# EAGLE board layout_final_pcb (EAGLE 9.7.0), part 1 of 3
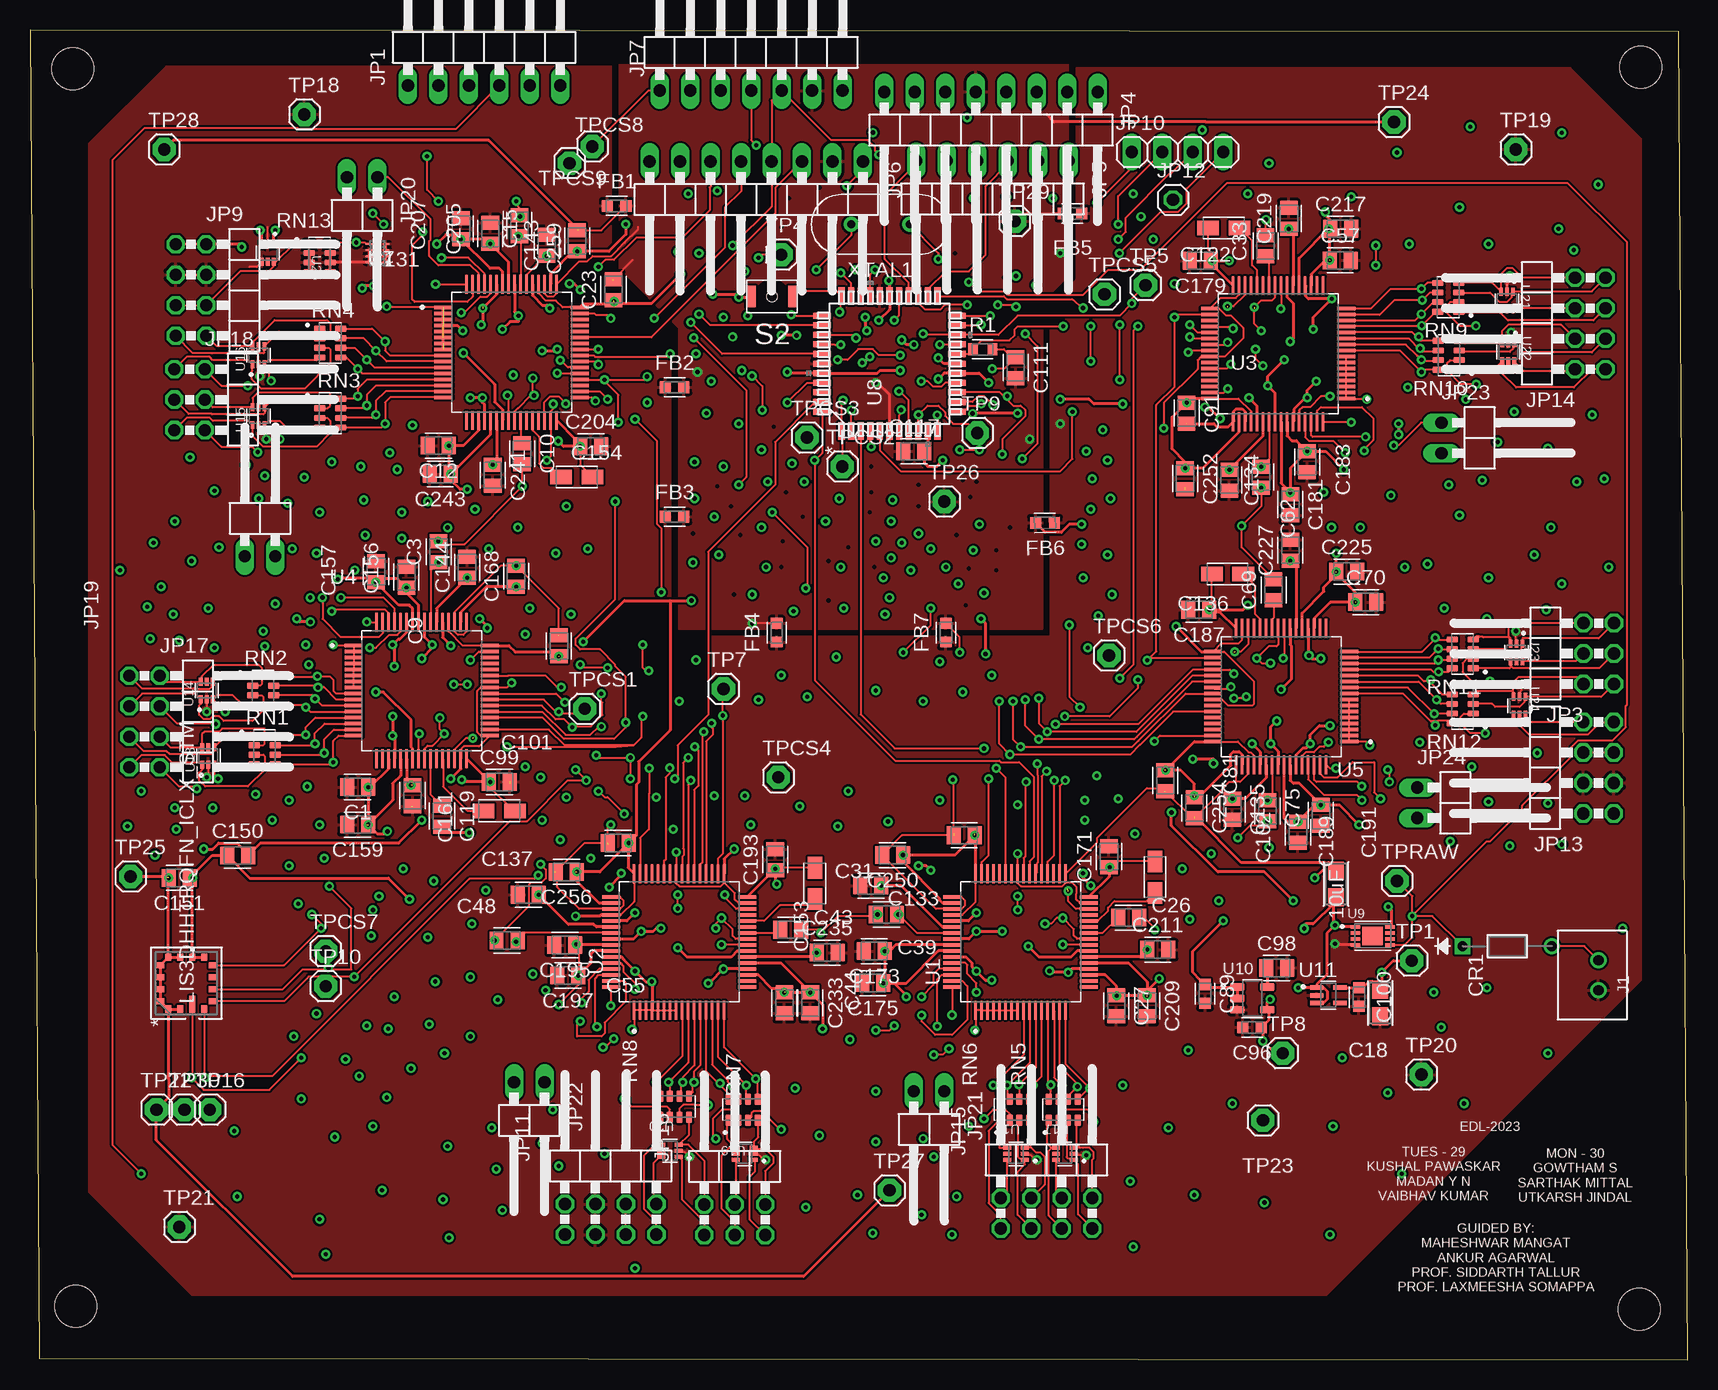
[diagram p0: board, top side]
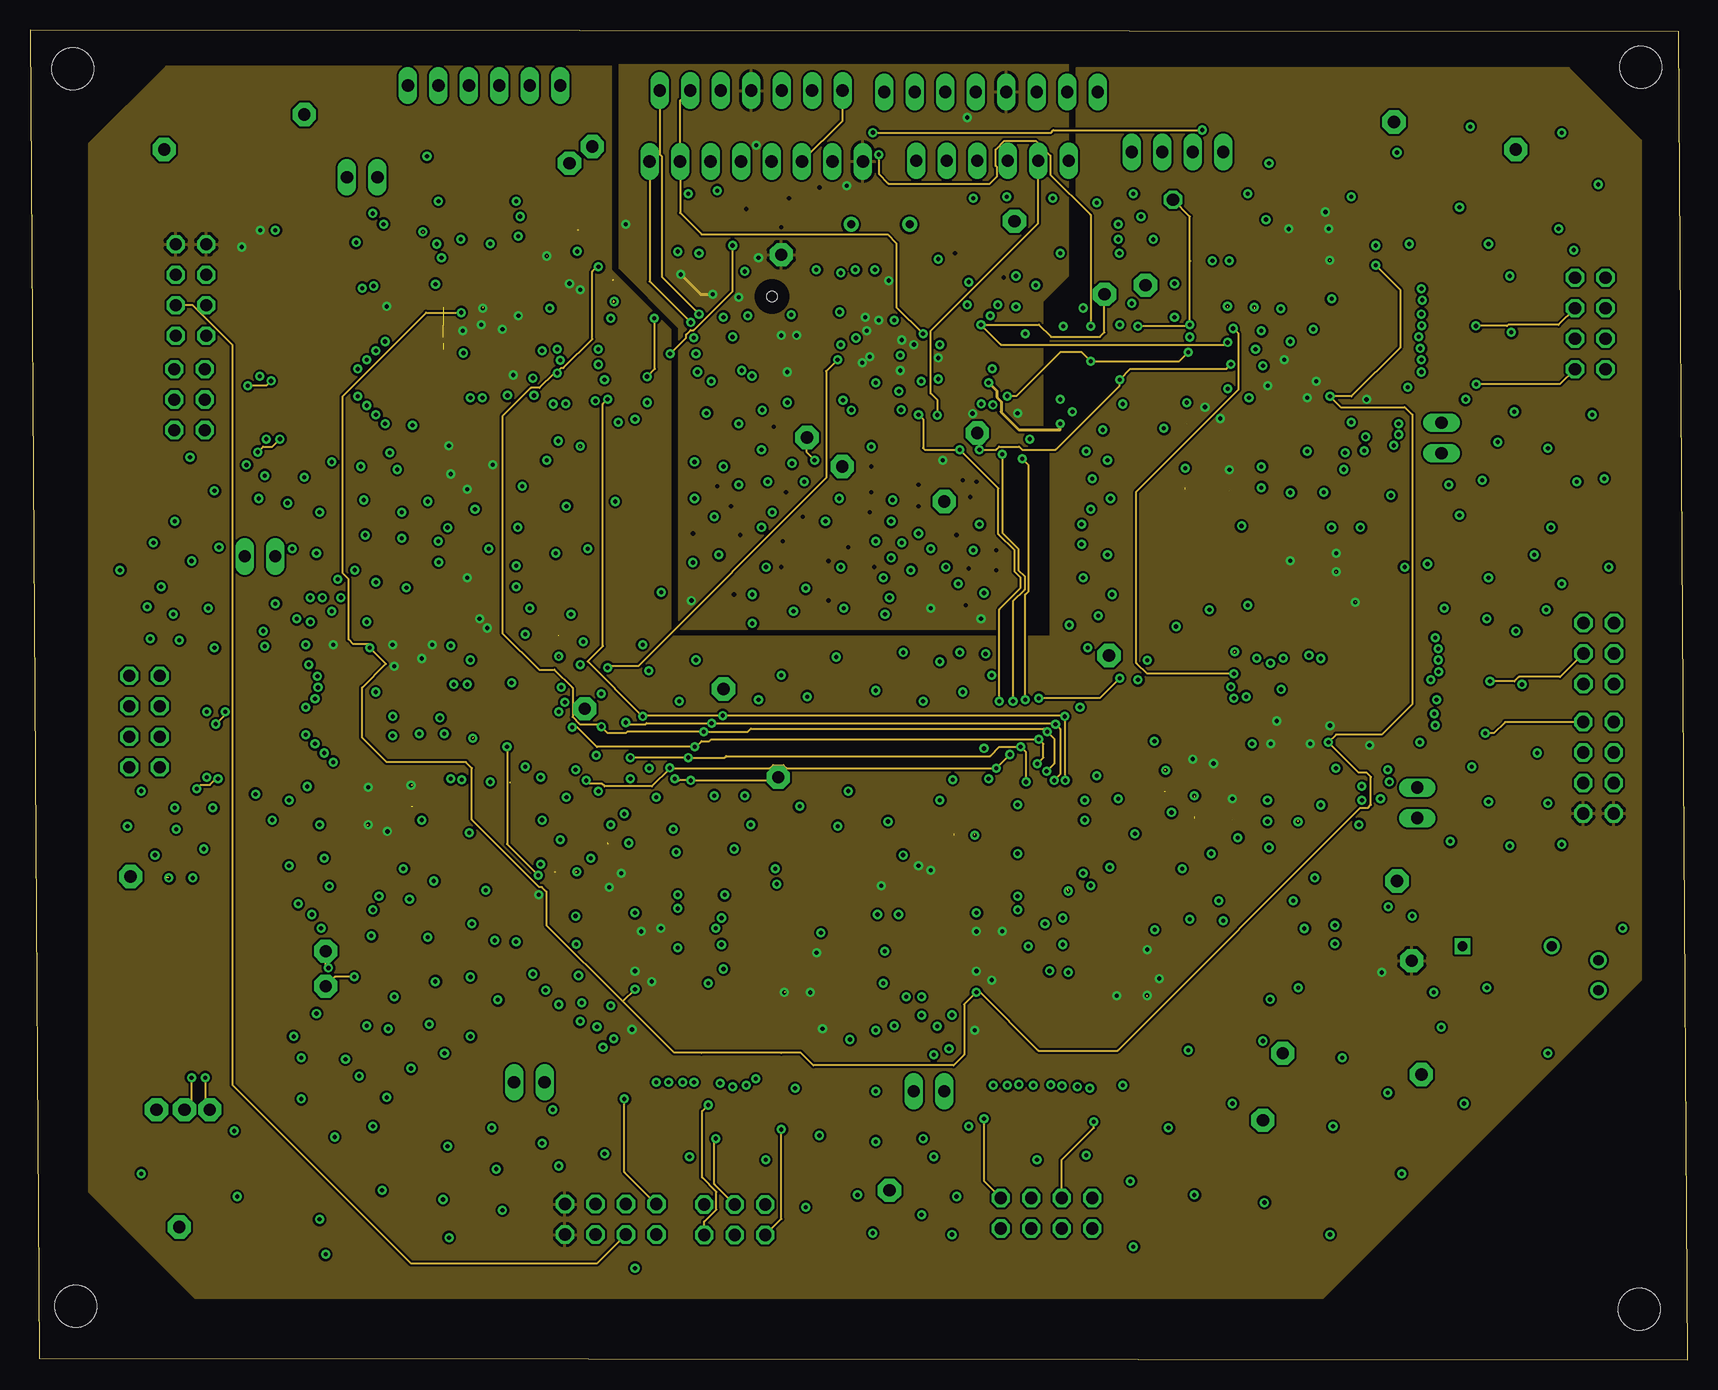
[diagram p1: board, inner layer Route2]
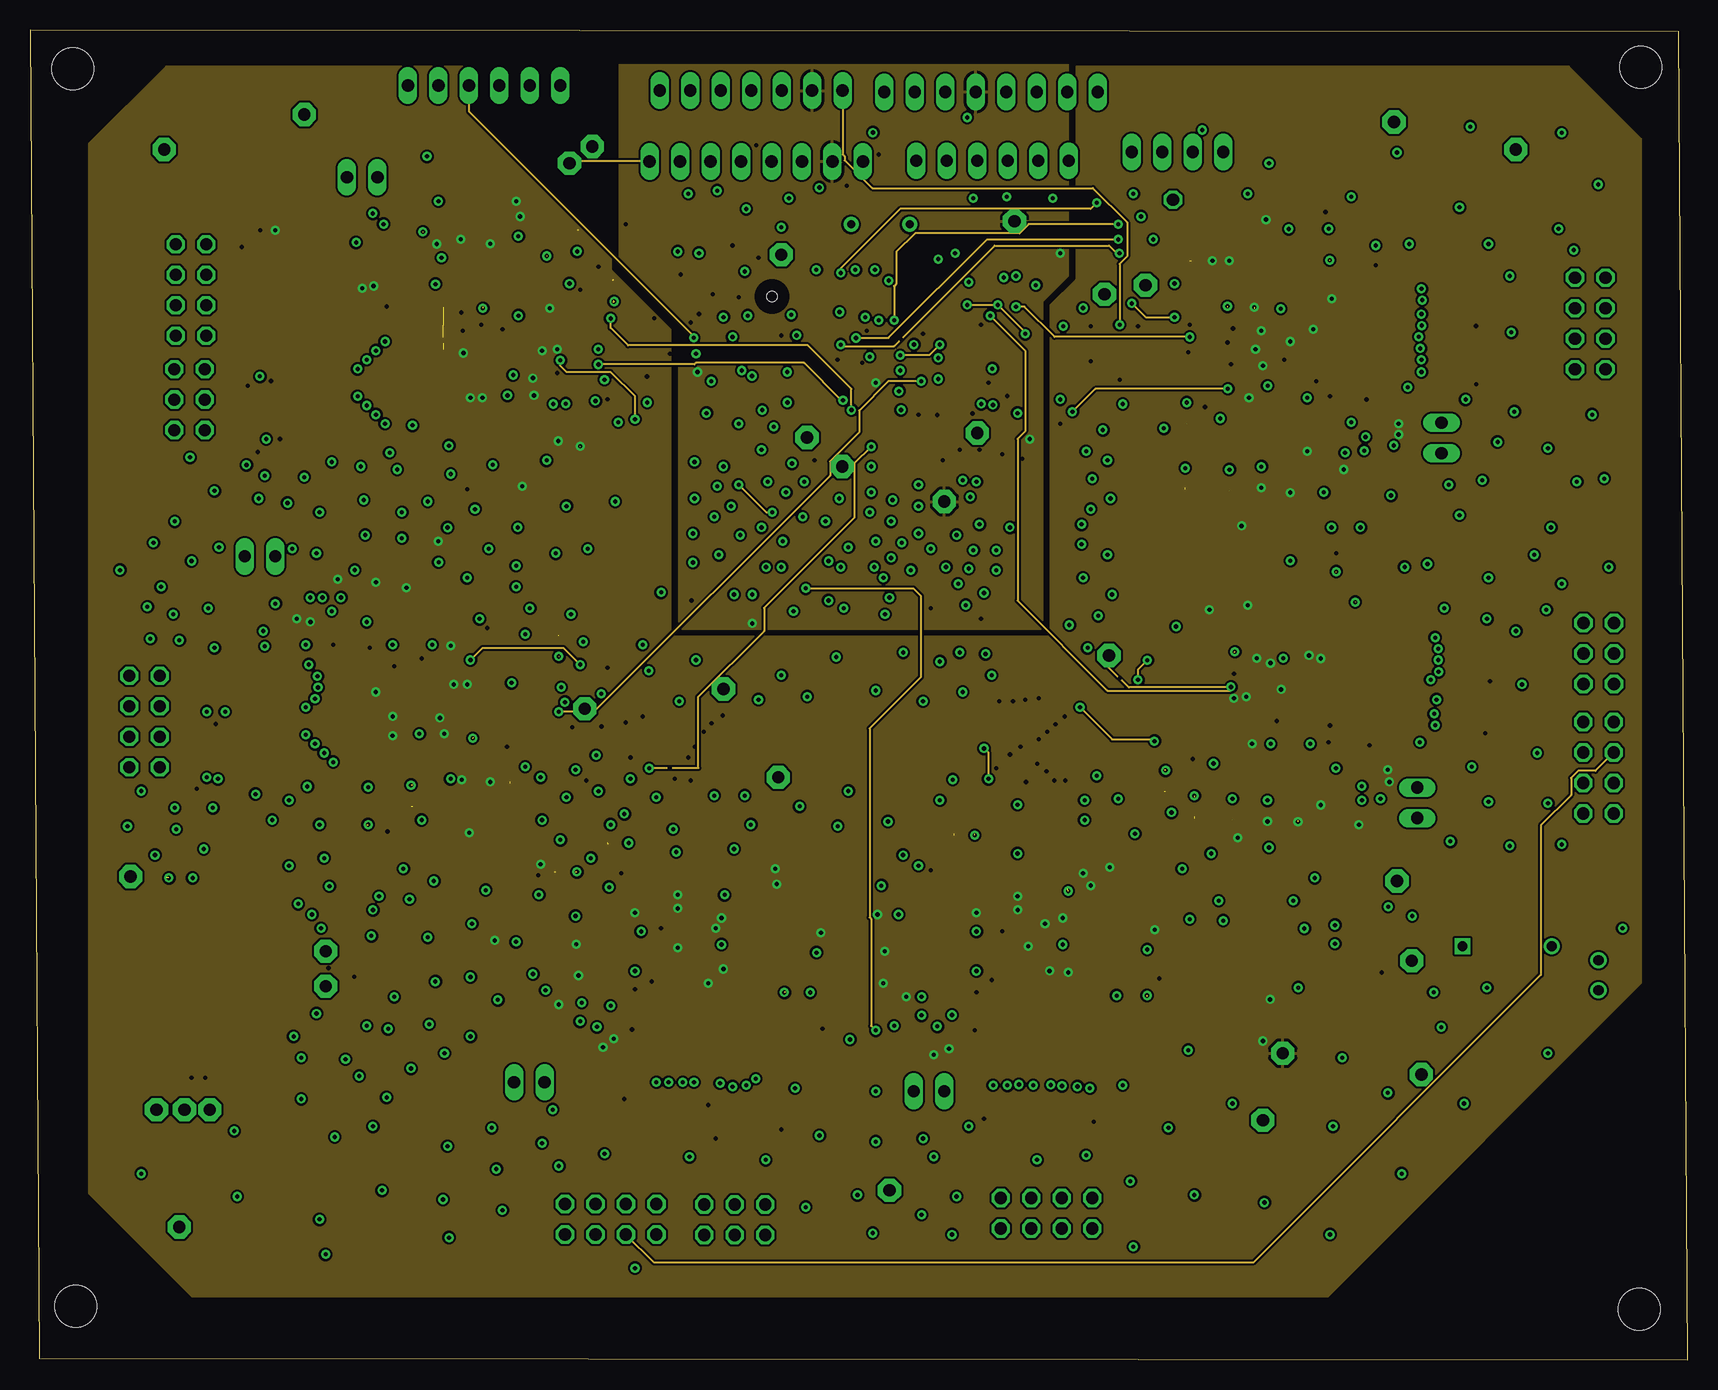
[diagram p2: board, inner layer Route15]
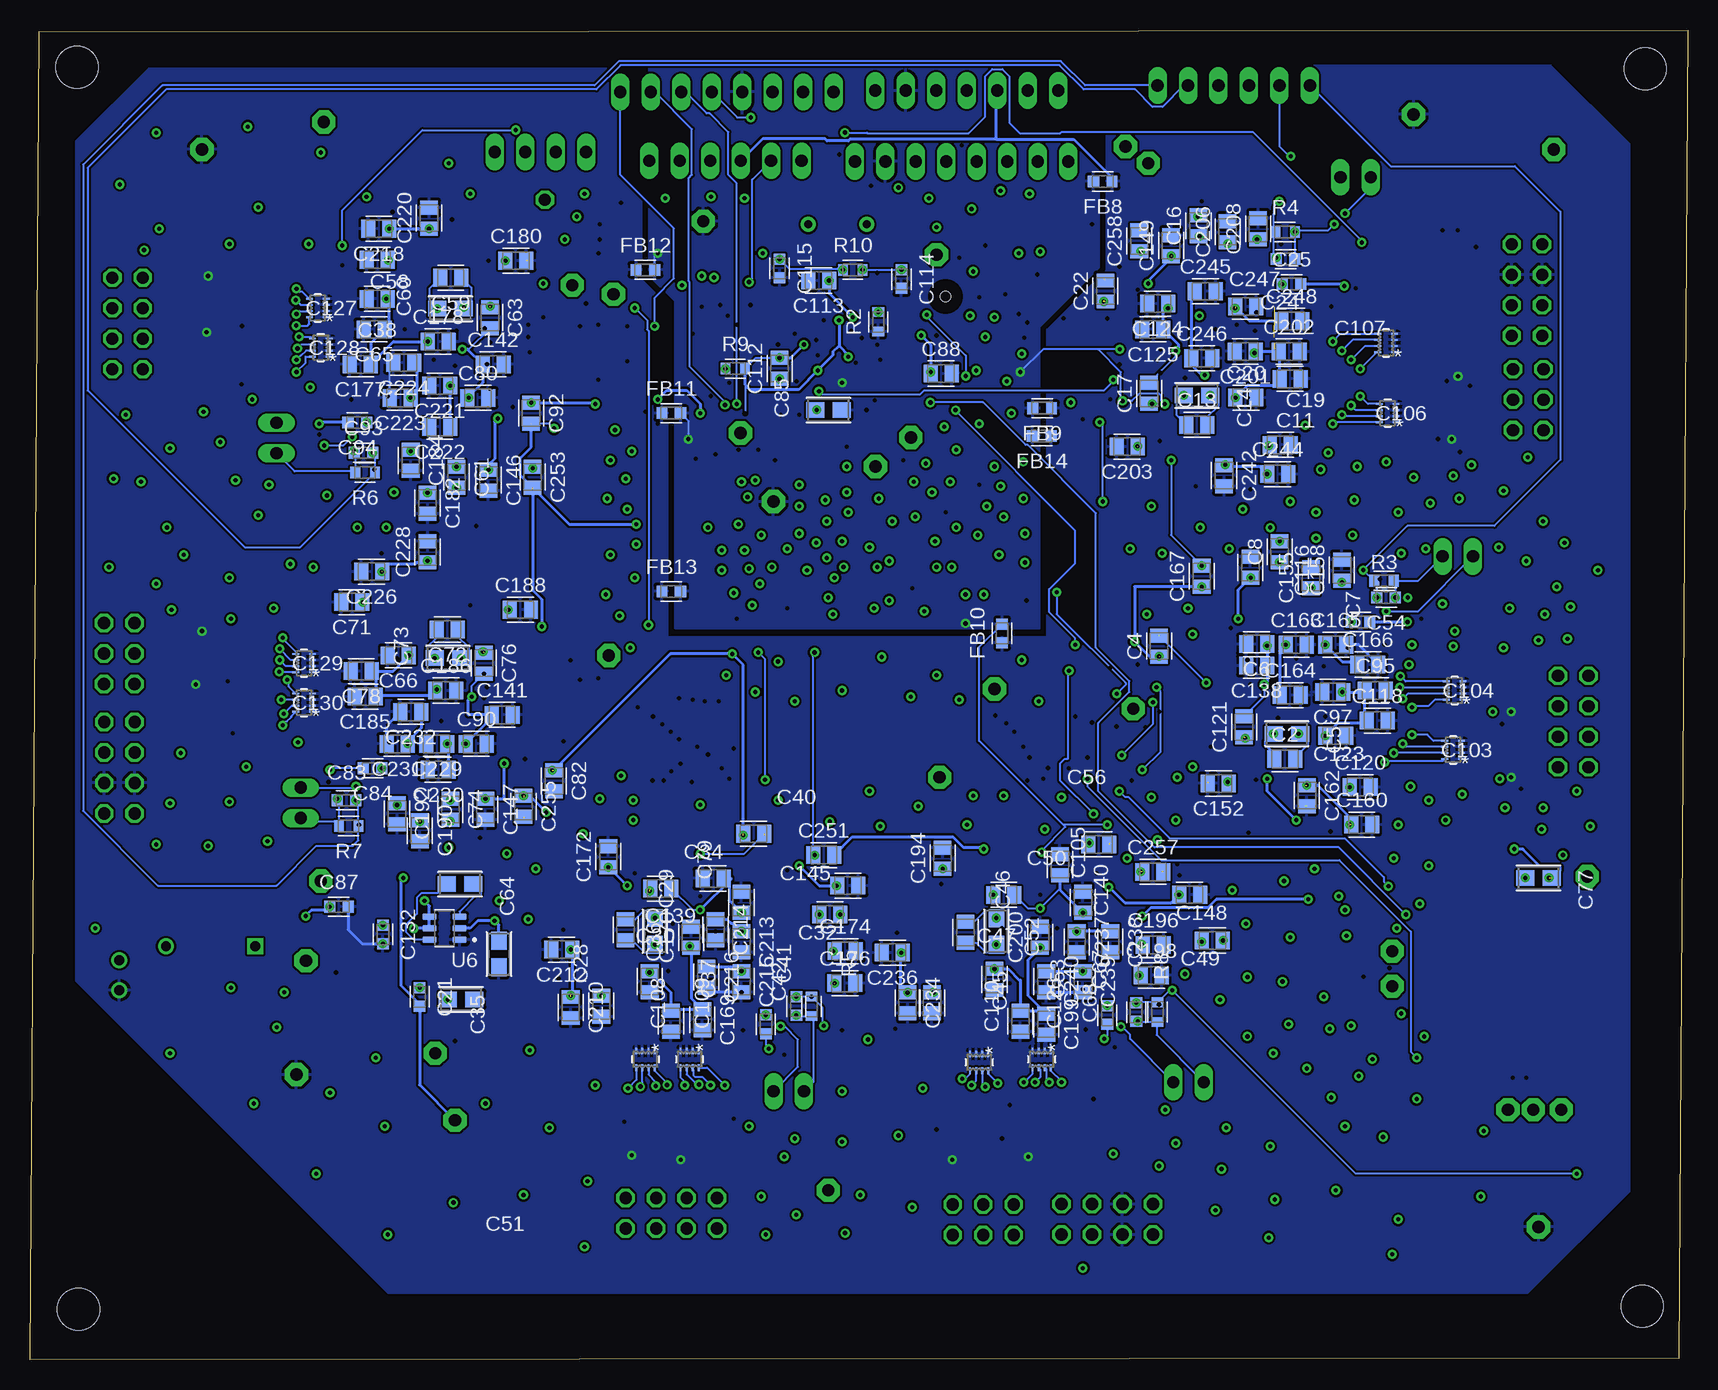
[diagram p3: board, bottom side, seen from below]

Size 138.16 x 110.8 mm. Coordinates in mm from the lower left corner, seen from the top.
Outline: 0.76,0.13 138.16,0 137.39,110.67 0,110.8 0.76,0.13
Copper layers (((1+2)*(15)+16)): Top 0.035mm / dielectric 1.5mm / Route2 0.035mm / dielectric 0.15mm / Route15 0.035mm / dielectric 0.2mm / Bottom 0.035mm
Design rules "default *": minimum track width 6mil, minimum drill 0.35mm, track to track 7mil, track to pad 7mil, pad to pad 7mil, via to via 7mil, smd to smd 7mil, copper to edge 40mil, drill to drill 6mil, minimum pad ring 10mil, minimum via ring 8mil, stop-mask expansion 4mil, vias tented up to drill 0mil, thermal gap 10mil
Holes 3.5 mm at 134.24,107.7 3.56,107.57 3.81,4.45 134.11,4.19

## Footprints (pad centres in the part's own frame; a part is rotated, then mirrored left to right if it is on the bottom)
CAPC2012X110 = smd 1.165 x 1.465: 1 -0.875,0; 2 0.875,0
CAP_293D-A_VSS = smd 1.498 x 1.295: 1 -1.105,0; 2 1.105,0
CAPC1608X85 = smd 0.921 x 0.97: 1 -0.775,0; 2 0.775,0
CAPM3216X180 = smd 1.796 x 1.189: 1 -1.31,0; 2 1.31,0
CKCL44_TDK-L = smd 0.559 x 0.152: 1 -0.699,0.762; 2 -0.699,0.254; 3 -0.699,-0.254; 4 -0.699,-0.762; 5 0.699,-0.762; 6 0.699,-0.254; 7 0.699,0.254; 8 0.699,0.762
DO-34_NEX = drill 0.813 pad 1.321 square: 1 0,0 | drill 0.813 pad 1.321: 2 7.442,0
BEADC1608X95N = smd 0.9 x 0.97: 1 -0.785,0 | smd 0.933 x 0.97: 2 0.769,0
B2B-XH-A = drill 0.84: 1 0,0; 2 2.5,0
1X06/90 = drill 1.016 long: 1 -6.35,-3.81; 2 -3.81,-3.81; 3 -1.27,-3.81; 4 1.27,-3.81; 5 3.81,-3.81; 6 6.35,-3.81
2X03/90 = drill 1.016 octagon: 1 -2.54,-6.35; 2 -2.54,-3.81; 3 0,-6.35; 4 0,-3.81; 5 2.54,-6.35; 6 2.54,-3.81
1X08/90 = drill 1.016 long: 1 -8.89,-3.81; 2 -6.35,-3.81; 3 -3.81,-3.81; 4 -1.27,-3.81; 5 1.27,-3.81; 6 3.81,-3.81; 7 6.35,-3.81; 8 8.89,-3.81
1X07/90 = drill 1.016 long: 1 -7.62,-3.81; 2 -5.08,-3.81; 3 -2.54,-3.81; 4 0,-3.81; 5 2.54,-3.81; 6 5.08,-3.81; 7 7.62,-3.81
2X04/90 = drill 1.016 octagon: 1 -3.81,-6.35; 2 -3.81,-3.81; 3 -1.27,-6.35; 4 -1.27,-3.81; 5 1.27,-6.35; 6 1.27,-3.81; 7 3.81,-6.35; 8 3.81,-3.81
1X04 = drill 1.016 long: 1 -3.81,0; 2 -1.27,0; 3 1.27,0; 4 3.81,0
1X01 = drill 1.016 octagon: 1 0,0
1X02/90 = drill 1.016 long: 1 -1.27,-3.81; 2 1.27,-3.81
RESC1608X60 = smd 0.799 x 0.974: 1 -0.815,0; 2 0.815,0
RESCAF80P320X160X60-8N = smd 0.97 x 0.53: 1 -0.875,1.2; 2 -0.875,0.4; 3 -0.875,-0.4; 4 -0.875,-1.2; 5 0.875,-1.2; 6 0.875,-0.4; 7 0.875,0.4; 8 0.875,1.2
B3U-3000P(M)-B = smd 0.8 x 1.8: 1 -1.75,0; 2 1.75,0 | hole 0.85: 0,0
1X01' = drill 1.016 pad 1.93 octagon: 1 0,0
QFP50P1200X1200X120-64N = smd 1.56 x 0.28: 1 -5.68,3.75; 2 -5.68,3.25; 3 -5.68,2.75; 4 -5.68,2.25; 5 -5.68,1.75; 6 -5.68,1.25; 7 -5.68,0.75; 8 -5.68,0.25; 9 -5.68,-0.25; 10 -5.68,-0.75; 11 -5.68,-1.25; 12 -5.68,-1.75; 13 -5.68,-2.25; 14 -5.68,-2.75; 15 -5.68,-3.25; 16 -5.68,-3.75; 33 5.68,-3.75; 34 5.68,-3.25; 35 5.68,-2.75; 36 5.68,-2.25; 37 5.68,-1.75; 38 5.68,-1.25; 39 5.68,-0.75; 40 5.68,-0.25; 41 5.68,0.25; 42 5.68,0.75; 43 5.68,1.25; 44 5.68,1.75; 45 5.68,2.25; 46 5.68,2.75; 47 5.68,3.25; 48 5.68,3.75 | smd 0.28 x 1.56: 17 -3.75,-5.68; 18 -3.25,-5.68; 19 -2.75,-5.68; 20 -2.25,-5.68; 21 -1.75,-5.68; 22 -1.25,-5.68; 23 -0.75,-5.68; 24 -0.25,-5.68; 25 0.25,-5.68; 26 0.75,-5.68; 27 1.25,-5.68; 28 1.75,-5.68; 29 2.25,-5.68; 30 2.75,-5.68; 31 3.25,-5.68; 32 3.75,-5.68; 49 3.75,5.68; 50 3.25,5.68; 51 2.75,5.68; 52 2.25,5.68; 53 1.75,5.68; 54 1.25,5.68; 55 0.75,5.68; 56 0.25,5.68; 57 -0.25,5.68; 58 -0.75,5.68; 59 -1.25,5.68; 60 -1.75,5.68; 61 -2.25,5.68; 62 -2.75,5.68; 63 -3.25,5.68; 64 -3.75,5.68
SOT95P280X145-6N = smd 1.21 x 0.58: 1 -1.255,0.95; 2 -1.255,0; 3 -1.255,-0.95; 4 1.255,-0.95; 5 1.255,0; 6 1.255,0.95
QFP44_10X10MC = smd 1.473 x 0.508: 1 -5.625,4; 2 -5.625,3.2; 3 -5.625,2.4; 4 -5.625,1.6; 5 -5.625,0.8; 6 -5.625,0; 7 -5.625,-0.8; 8 -5.625,-1.6; 9 -5.625,-2.4; 10 -5.625,-3.2; 11 -5.625,-4; 23 5.625,-4; 24 5.625,-3.2; 25 5.625,-2.4; 26 5.625,-1.6; 27 5.625,-0.8; 28 5.625,0; 29 5.625,0.8; 30 5.625,1.6; 31 5.625,2.4; 32 5.625,3.2; 33 5.625,4 | smd 0.508 x 1.473: 12 -4,-5.625; 13 -3.2,-5.625; 14 -2.4,-5.625; 15 -1.6,-5.625; 16 -0.8,-5.625; 17 0,-5.625; 18 0.8,-5.625; 19 1.6,-5.625; 20 2.4,-5.625; 21 3.2,-5.625; 22 4,-5.625; 34 4,5.625; 35 3.2,5.625; 36 2.4,5.625; 37 1.6,5.625; 38 0.8,5.625; 39 0,5.625; 40 -0.8,5.625; 41 -1.6,5.625; 42 -2.4,5.625; 43 -3.2,5.625; 44 -4,5.625
SON50P200X300X100-9N = smd 0.84 x 0.26: 1 -1.435,0.75; 2 -1.435,0.25; 3 -1.435,-0.25; 4 -1.435,-0.75; 5 1.435,-0.75; 6 1.435,-0.25; 7 1.435,0.25; 8 1.435,0.75 | smd 1.7 x 1.525: 9 0,0
SOT95P280X145-5N = smd 1.21 x 0.59: 1 -1.255,0.95; 2 -1.255,0; 3 -1.255,-0.95; 4 1.255,-0.95; 5 1.255,0.95
SOT65P210X110-5N = smd 1.19 x 0.4: 1 -0.96,0.65; 2 -0.96,0; 3 -0.96,-0.65; 4 0.96,-0.65; 5 0.96,0.65
SOT50P160X60-6N = smd 0.66 x 0.31: 1 -0.735,0.5; 2 -0.735,0; 3 -0.735,-0.5; 4 0.735,-0.5; 5 0.735,0; 6 0.735,0.5
QFN_ICLX_STM = smd 1.397 x 0.508: 1 -1.767,-0.5 | smd 0.61 x 0.508: 2 -2.161,-1.5; 7 2.161,-1.5; 8 2.161,-0.5; 9 2.161,0.5; 10 2.161,1.5; 15 -2.161,1.5; 16 -2.161,0.5 | smd 0.508 x 0.61: 3 -1.5,-2.161; 4 -0.5,-2.161; 5 0.5,-2.161; 6 1.5,-2.161; 11 1.5,2.161; 12 0.5,2.161; 13 -0.5,2.161; 14 -1.5,2.161
XTALRR488W45L1150T500H350B = drill 0.657 pad 1.257: 1 -2.44,0; 2 2.44,0

## Placement (x,y rotation side)
C1  0.1uF  [CAPC2012X110]  27.3,47.71 180 top
C2  0.1uF  [CAPC2012X110]  33.59,50.05 0 bottom
C3  1uF  [CAPC2012X110]  34.05,67.32 90 top
C4  1uF  [CAPC2012X110]  44.06,59.45 90 bottom
C5  10uF  [CAP_293D-A_VSS]  33.42,52.14 180 bottom
C6  0.1uF  [CAPC2012X110]  35.94,59.62 180 bottom
C7  100pF  [CAPC1608X85]  27.29,61.47 0 bottom
C8  0.1uF  [CAPC2012X110]  34.02,67.32 90 bottom
C9  0.1uF  [CAPC2012X110]  44.07,59.47 90 top
C10  1uF  [CAPC2012X110]  41.01,75.48 270 top
C11  0.1uF  [CAPC2012X110]  33.95,76.22 0 bottom
C12  1uF  [CAPC2012X110]  34.04,76.16 180 top
C13  0.1uF  [CAPC2012X110]  40.92,77.89 0 bottom
C14  10uF  [CAP_293D-A_VSS]  40.89,80.34 180 bottom
C15  1uF  [CAPC2012X110]  40.78,94.49 90 top
C16  0.1uF  [CAPC2012X110]  40.78,94.48 90 bottom
C17  1uF  [CAPC2012X110]  44.89,80.52 90 bottom
C18  10uF  [CAP_293D-A_VSS]  112.52,29.72 90 top
C19  1uF  [CAPC2012X110]  33.14,81.72 0 bottom
C20  0.1uF  [CAPC2012X110]  36.83,80.15 0 bottom
C21  2.2uF  [CAPC1608X85]  105.69,30.22 270 bottom
C22  1uF  [CAPC2012X110]  48.55,89.04 90 bottom
C23  0.1uF  [CAPC2012X110]  48.63,89.15 90 top
C24  1.5nF  [CAPC1608X85]  33.52,91.7 180 bottom
C25  100pF  [CAPC1608X85]  33.02,89.62 0 bottom
C26  1uF  [CAPC2012X110]  91.55,36.83 0 top
C27  0.1uF  [CAPC2012X110]  90.52,29.47 270 top
C28  1uF  [CAPC2012X110]  90.55,29.45 270 bottom
C29  0.1uF  [CAPC2012X110]  88.52,35.81 270 bottom
C30  10uF  [CAP_293D-A_VSS]  86.07,35.69 90 bottom
C31  1uF  [CAPC2012X110]  71.37,37.08 180 top
C32  0.1uF  [CAPC2012X110]  71.5,37.08 0 bottom
C33  1uF  [CAPC2012X110]  102.97,92.81 90 top
C34  1uF  [CAPC2012X110]  85.6,39.24 0 bottom
C35  10uF  [CAP_293D-A_VSS]  102.23,30.01 180 bottom
C36  1uF  [CAPC2012X110]  86.51,31.5 270 bottom
C37  0.1uF  [CAPC2012X110]  84.74,28.19 270 bottom
C38  1uF  [CAPC2012X110]  109.22,88.38 180 bottom
C39  1uF  [CAPC2012X110]  77.85,43.69 180 top
C40  0.1uF  [CAPC2012X110]  77.85,43.81 0 bottom
C41  1.5nF  [CAPC1608X85]  74.3,29.46 90 bottom
C42  100pF  [CAPC1608X85]  76.83,27.94 270 bottom
C43  1uF  [CAPC2012X110]  63.39,35.82 0 top
C44  0.1uF  [CAPC2012X110]  62.86,29.72 270 top
C45  1uF  [CAPC2012X110]  62.99,29.72 270 bottom
C46  0.1uF  [CAPC2012X110]  60.2,35.59 270 bottom
C47  10uF  [CAP_293D-A_VSS]  57.62,35.69 90 bottom
C48  1uF  [CAPC2012X110]  39.75,34.92 180 top
C49  0.1uF  [CAPC2012X110]  39.62,34.92 0 bottom
C50  1uF  [CAPC2012X110]  57.01,38.72 0 bottom
C51  10uF  [CAP_293D-A_VSS]  99.08,33.78 90 bottom
C52  1uF  [CAPC2012X110]  57.78,31.67 270 bottom
C53  0.1uF  [CAPC2012X110]  55.63,28.19 270 bottom
C54  1.5nF  [CAPC1608X85]  25.15,63.5 180 bottom
C55  1uF  [CAPC2012X110]  49.01,43.05 180 top
C56  0.1uF  [CAPC2012X110]  49.08,42.93 0 bottom
C57  0.1uF  [CAPC2012X110]  109.19,91.6 0 top
C58  1uF  [CAPC2012X110]  109.22,91.65 180 bottom
C59  0.1uF  [CAPC2012X110]  103.1,90.15 180 bottom
C60  10uF  [CAP_293D-A_VSS]  103.12,87.57 0 bottom
C61  1uF  [CAPC2012X110]  102.62,73.53 270 bottom
C62  0.1uF  [CAPC2012X110]  102.6,73.53 270 top
C63  1uF  [CAPC2012X110]  99.82,86.83 270 bottom
C64  10uF  [CAP_293D-A_VSS]  102.33,39.62 180 bottom
C65  0.1uF  [CAPC2012X110]  109.47,85.85 180 bottom
C66  1uF  [CAPC2012X110]  107.46,58.68 180 bottom
C67  1.5nF  [CAPC1608X85]  45.97,28.96 90 bottom
C68  100pF  [CAPC1608X85]  48.39,28.7 270 bottom
C69  1uF  [CAPC2012X110]  103.63,64.14 90 top
C70  0.1uF  [CAPC2012X110]  111.31,63.12 0 top
C71  1uF  [CAPC2012X110]  111.34,63.12 180 bottom
C72  0.1uF  [CAPC2012X110]  103.38,60.83 180 bottom
C73  10uF  [CAP_293D-A_VSS]  103.33,58.44 0 bottom
C74  1uF  [CAPC2012X110]  103.12,45.85 270 bottom
C75  0.1uF  [CAPC2012X110]  103.12,45.72 270 top
C76  1uF  [CAPC2012X110]  100.33,58.04 270 bottom
C77  10uF  [CAP_293D-A_VSS]  12.45,40.13 180 bottom
C78  0.1uF  [CAPC2012X110]  110.55,57.37 180 bottom
C79  0.1uF  [CAPC2012X110]  78.87,38.1 90 bottom
C80  0.1uF  [CAPC2012X110]  100.84,80.14 0 bottom
C81  1uF  [CAPC2012X110]  94.6,48.25 270 top
C82  0.1uF  [CAPC2012X110]  94.5,48.22 270 bottom
C83  1.5nF  [CAPC1608X85]  111.77,46.61 0 bottom
C84  100pF  [CAPC1608X85]  109.6,49.28 180 bottom
C85  10uF  [CAP_293D-A_VSS]  71.63,79.12 0 bottom
C86  10uF  [CAP_293D-A_VSS]  108.84,39.62 270 top
C87  2.2uF  [CAPC1608X85]  112.42,37.74 0 bottom
C88  0.1uF  [CAPC2012X110]  62.23,82.17 0 bottom
C89  2.2uF  [CAPC1608X85]  97.92,30.48 270 top
C90  0.1uF  [CAPC2012X110]  100.97,51.31 0 bottom
C91  1uF  [CAPC2012X110]  96.39,78.87 270 top
C92  0.1uF  [CAPC2012X110]  96.39,78.87 270 bottom
C93  1.5nF  [CAPC1608X85]  110.36,75.56 0 bottom
C94  100pF  [CAPC1608X85]  110.88,78.1 180 bottom
C95  0.1uF  [CAPC2012X110]  26.04,55.75 0 bottom
C96  2.2uF  [CAPC1608X85]  101.84,27.67 180 top
C97  1uF  [CAPC2012X110]  29.59,55.63 180 bottom
C98  0.01uF  [CAPC2012X110]  103.89,32.63 0 top
C99  0.1uF  [CAPC2012X110]  39.12,48.13 0 top
C100  2.2uF  [CAPC1608X85]  110.74,30.2 270 top
C101  22uF  [CAPM3216X180]  39.12,45.72 0 top
C102  22uF  [CAPM3216X180]  93.75,40.21 90 top
C103  CKCL44X7R1H102M085AACKCL44_TDK-L  [CKCL44_TDK-L]  19.56,50.8 180 bottom
C104  CKCL44X7R1H102M085AACKCL44_TDK-L  [CKCL44_TDK-L]  19.43,55.75 180 bottom
C105  0.1uF  [CAPC2012X110]  52.32,41.24 90 bottom
C106  CKCL44X7R1H102M085AACKCL44_TDK-L  [CKCL44_TDK-L]  25.02,78.87 180 bottom
C107  CKCL44X7R1H102M085AACKCL44_TDK-L  [CKCL44_TDK-L]  25.15,84.71 180 bottom
C108  CKCL44X7R1H102M085AACKCL44_TDK-L  [CKCL44_TDK-L]  86.87,25.02 270 bottom
C109  CKCL44X7R1H102M085AACKCL44_TDK-L  [CKCL44_TDK-L]  83.19,25.02 270 bottom
C110  CKCL44X7R1H102M085AACKCL44_TDK-L  [CKCL44_TDK-L]  59.05,24.77 270 bottom
C111  0.1uF  [CAPC2012X110]  82.14,82.66 270 top
C112  0.1uF  [CAPC2012X110]  75.69,82.59 90 bottom
C113  0.1uF  [CAPC2012X110]  72.45,89.92 180 bottom
C114  15pF  [CAPC1608X85]  65.53,90.04 270 bottom
C115  15pF  [CAPC1608X85]  75.69,90.93 270 bottom
C116  0.1uF  [CAPC2012X110]  36.46,66.01 90 bottom
C117  0.1uF  [CAPC2012X110]  73.66,75.69 0 top
C118  1uF  [CAPC2012X110]  25.88,53.25 0 bottom
C119  1uF  [CAPC2012X110]  34.33,45.28 270 top
C120  1uF  [CAPC2012X110]  27.3,47.7 0 bottom
C121  1uF  [CAPC2012X110]  36.98,52.72 90 bottom
C122  22uF  [CAPM3216X180]  99.48,94.3 180 top
C123  0.1uF  [CAPC2012X110]  29.34,51.98 0 bottom
C124  0.1uF  [CAPC2012X110]  44.2,87.99 180 bottom
C125  1uF  [CAPC2012X110]  44.58,85.84 180 bottom
C126  CKCL44X7R1H102M085AACKCL44_TDK-L  [CKCL44_TDK-L]  53.85,25.02 270 bottom
C127  CKCL44X7R1H102M085AACKCL44_TDK-L  [CKCL44_TDK-L]  114.17,87.63 180 bottom
C128  CKCL44X7R1H102M085AACKCL44_TDK-L  [CKCL44_TDK-L]  113.92,84.33 180 bottom
C129  CKCL44X7R1H102M085AACKCL44_TDK-L  [CKCL44_TDK-L]  115.32,58.04 180 bottom
C130  CKCL44X7R1H102M085AACKCL44_TDK-L  [CKCL44_TDK-L]  115.32,54.74 180 bottom
C131  CKCL44X7R1H102M085AACKCL44_TDK-L  [CKCL44_TDK-L]  28.96,92.2 180 top
C132  2.2uF  [CAPC1608X85]  108.75,35.43 270 bottom
C133  0.1uF  [CAPC2012X110]  70.07,39.49 180 top
C134  0.1uF  [CAPC2012X110]  99.95,73.29 270 top
C135  0.1uF  [CAPC2012X110]  100.2,45.85 270 top
C136  22uF  [CAPM3216X180]  99.79,65.47 180 top
C137  0.1uF  [CAPC2012X110]  41.53,38.73 180 top
C138  1uF  [CAPC2012X110]  35.95,57.84 180 bottom
C139  1uF  [CAPC2012X110]  81.24,40.09 180 bottom
C140  1uF  [CAPC2012X110]  50.41,38.1 90 bottom
C141  1uF  [CAPC2012X110]  98.81,53.72 0 bottom
C142  1uF  [CAPC2012X110]  99.57,82.93 0 bottom
C143  0.1uF  [CAPC2012X110]  43.06,92.84 90 top
C144  1uF  [CAPC2012X110]  36.43,66.01 90 top
C145  1uF  [CAPC2012X110]  70,39.5 0 bottom
C146  1uF  [CAPC2012X110]  99.95,73.28 270 bottom
C147  1uF  [CAPC2012X110]  100.2,45.85 270 bottom
C148  1uF  [CAPC2012X110]  41.53,38.73 0 bottom
C149  1uF  [CAPC2012X110]  43.06,92.83 90 bottom
C150  0.1uF  [CAPC2012X110]  17.29,42 0 top
C151  0.1uF  [CAPC2012X110]  12.45,40.14 180 top
C152  1uF  [CAPC2012X110]  39.12,48.01 180 bottom
C153  22uF  [CAPM3216X180]  65.41,39.67 90 top
C154  22uF  [CAPM3216X180]  45.55,73.54 0 top
C155  0.1uF  [CAPC2012X110]  31.42,65.15 90 bottom
C156  1uF  [CAPC2012X110]  31.37,65.2 90 top
C157  0.1uF  [CAPC2012X110]  28.83,65.66 90 top
C158  1uF  [CAPC2012X110]  28.83,65.79 90 bottom
C159  0.1uF  [CAPC2012X110]  27.3,44.58 180 top
C160  1uF  [CAPC2012X110]  27.18,44.58 0 bottom
C161  0.1uF  [CAPC2012X110]  31.88,46.99 270 top
C162  1uF  [CAPC2012X110]  31.75,46.99 270 bottom
C163  0.1uF  [CAPC2012X110]  32.64,59.56 0 bottom
C164  1uF  [CAPC2012X110]  33.15,55.37 0 bottom
C165  0.1uF  [CAPC2012X110]  29.34,59.56 0 bottom
C166  1uF  [CAPC2012X110]  26.67,57.92 0 bottom
C167  0.1uF  [CAPC2012X110]  40.51,65.28 90 bottom
C168  1uF  [CAPC2012X110]  40.51,65.28 90 top
C169  0.1uF  [CAPC2012X110]  82.13,28.32 270 bottom
C170  1uF  [CAPC2012X110]  83.06,35.18 90 bottom
C171  0.1uF  [CAPC2012X110]  89.92,41.91 90 top
C172  1uF  [CAPC2012X110]  89.97,41.91 90 bottom
C173  0.1uF  [CAPC2012X110]  70.36,34.04 180 top
C174  1uF  [CAPC2012X110]  70.23,34.04 0 bottom
C175  0.1uF  [CAPC2012X110]  70.23,31.37 180 top
C176  1uF  [CAPC2012X110]  70.25,31.36 0 bottom
C177  0.1uF  [CAPC2012X110]  110.62,82.93 180 bottom
C178  1uF  [CAPC2012X110]  104.14,84.84 0 bottom
C179  0.1uF  [CAPC2012X110]  97.54,91.57 180 top
C180  1uF  [CAPC2012X110]  97.66,91.57 0 bottom
C181  0.1uF  [CAPC2012X110]  105.03,71.25 270 top
C182  1uF  [CAPC2012X110]  105.03,71.37 270 bottom
C183  0.1uF  [CAPC2012X110]  106.43,74.8 270 top
C184  1uF  [CAPC2012X110]  106.43,74.93 270 bottom
C185  0.1uF  [CAPC2012X110]  110.24,55.25 180 bottom
C186  1uF  [CAPC2012X110]  103.5,55.75 0 bottom
C187  0.1uF  [CAPC2012X110]  97.41,62.48 180 top
C188  1uF  [CAPC2012X110]  97.28,62.48 0 bottom
C189  0.1uF  [CAPC2012X110]  105.66,43.94 270 top
C190  1uF  [CAPC2012X110]  105.66,44.07 270 bottom
C191  0.1uF  [CAPC2012X110]  107.57,45.34 270 top
C192  1uF  [CAPC2012X110]  107.57,45.47 270 bottom
C193  0.1uF  [CAPC2012X110]  62.1,41.66 90 top
C194  1uF  [CAPC2012X110]  62.1,41.78 90 bottom
C195  0.1uF  [CAPC2012X110]  44.58,34.54 180 top
C196  1uF  [CAPC2012X110]  44.56,34.54 0 bottom
C197  0.1uF  [CAPC2012X110]  44.83,32 180 top
C198  1uF  [CAPC2012X110]  44.7,32 0 bottom
C199  0.1uF  [CAPC2012X110]  53.47,27.94 270 bottom
C200  1uF  [CAPC2012X110]  53.97,35.18 90 bottom
C201  0.1uF  [CAPC2012X110]  36.89,84.01 180 bottom
C202  1uF  [CAPC2012X110]  33.24,84 0 bottom
C203  0.1uF  [CAPC2012X110]  46.74,76.07 180 bottom
C204  1uF  [CAPC2012X110]  46.74,76.11 0 top
C205  0.1uF  [CAPC2012X110]  38.35,93.85 90 top
C206  1uF  [CAPC2012X110]  38.35,93.98 90 bottom
C207  0.1uF  [CAPC2012X110]  35.91,94.23 90 top
C208  1uF  [CAPC2012X110]  35.81,94.23 90 bottom
C209  0.1uF  [CAPC2012X110]  93.09,29.46 270 top
C210  1uF  [CAPC2012X110]  93.09,29.34 270 bottom
C211  0.1uF  [CAPC2012X110]  93.98,34.16 0 top
C212  1uF  [CAPC2012X110]  93.85,34.16 180 bottom
C213  0.1uF  [CAPC2012X110]  78.87,34.8 270 bottom
C214  1uF  [CAPC2012X110]  81.03,35.81 270 bottom
C215  0.1uF  [CAPC2012X110]  78.87,31.5 270 bottom
C216  1uF  [CAPC2012X110]  81.79,31.88 270 bottom
C217  0.1uF  [CAPC2012X110]  109.22,94.23 0 top
C218  1uF  [CAPC2012X110]  109.09,94.23 180 bottom
C219  0.1uF  [CAPC2012X110]  104.9,95.09 90 top
C220  1uF  [CAPC2012X110]  104.9,95.12 90 bottom
C221  0.1uF  [CAPC2012X110]  104.01,81.15 180 bottom
C222  1uF  [CAPC2012X110]  104.01,77.72 180 bottom
C223  0.1uF  [CAPC2012X110]  107.31,80.14 180 bottom
C224  1uF  [CAPC2012X110]  107.02,83.07 180 bottom
C225  0.1uF  [CAPC2012X110]  109.73,65.66 0 top
C226  1uF  [CAPC2012X110]  109.69,65.66 180 bottom
C227  0.1uF  [CAPC2012X110]  105.03,67.44 90 top
C228  1uF  [CAPC2012X110]  105.03,67.31 90 bottom
C229  0.1uF  [CAPC2012X110]  104.27,51.31 180 bottom
C230  1uF  [CAPC2012X110]  104.14,49.15 180 bottom
C231  0.1uF  [CAPC2012X110]  107.57,51.31 180 bottom
C232  1uF  [CAPC2012X110]  106.43,53.97 180 bottom
C233  0.1uF  [CAPC2012X110]  65.02,29.72 270 top
C234  1uF  [CAPC2012X110]  65.02,29.72 270 bottom
C235  0.1uF  [CAPC2012X110]  66.42,33.91 0 top
C236  1uF  [CAPC2012X110]  66.29,33.91 180 bottom
C237  0.1uF  [CAPC2012X110]  50.93,34.8 270 bottom
C238  1uF  [CAPC2012X110]  48.13,34.8 270 bottom
C239  0.1uF  [CAPC2012X110]  50.42,31.5 270 bottom
C240  1uF  [CAPC2012X110]  53.47,31.5 270 bottom
C241  0.1uF  [CAPC2012X110]  38.56,73.69 270 top
C242  1uF  [CAPC2012X110]  38.65,73.66 270 bottom
C243  0.1uF  [CAPC2012X110]  34.19,73.79 180 top
C244  1uF  [CAPC2012X110]  34.19,73.79 0 bottom
C245  0.1uF  [CAPC2012X110]  40.21,89.03 0 bottom
C246  1uF  [CAPC2012X110]  40.51,83.44 0 bottom
C247  0.1uF  [CAPC2012X110]  36.86,87.74 0 bottom
C248  1uF  [CAPC2012X110]  33.02,86.55 0 bottom
C250  0.1uF  [CAPC2012X110]  71.88,42.04 180 top
C251  1uF  [CAPC2012X110]  72.01,42.04 0 bottom
C252  0.1uF  [CAPC2012X110]  96.27,73.41 270 top
C253  1uF  [CAPC2012X110]  96.27,73.53 270 bottom
C254  0.1uF  [CAPC2012X110]  97.03,45.97 270 top
C255  1uF  [CAPC2012X110]  97.03,46.1 270 bottom
C256  0.1uF  [CAPC2012X110]  44.7,40.64 180 top
C257  1uF  [CAPC2012X110]  44.58,40.64 0 bottom
C258  0.1uF  [CAPC2012X110]  45.72,93.22 90 bottom
C259  1uF  [CAPC2012X110]  45.59,93.22 90 top
CR1  BAT85,113DO-34_NEX  [DO-34_NEX]  119.38,34.45 0 top
FB1  FERRITE_BEAD  [BEADC1608X95N]  48.89,96.14 0 top
FB2  FERRITE_BEAD  [BEADC1608X95N]  53.72,81.03 0 top
FB3  FERRITE_BEAD  [BEADC1608X95N]  53.72,70.23 0 top
FB4  FERRITE_BEAD  [BEADC1608X95N]  62.23,60.58 90 top
FB5  FERRITE_BEAD  [BEADC1608X95N]  86.87,95.5 180 top
FB6  FERRITE_BEAD  [BEADC1608X95N]  84.58,69.72 180.4 top
FB7  FERRITE_BEAD  [BEADC1608X95N]  76.33,60.58 90 top
FB8  FERRITE_BEAD  [BEADC1608X95N]  48.77,98.17 180 bottom
FB9  FERRITE_BEAD  [BEADC1608X95N]  53.82,79.28 180 bottom
FB10  FERRITE_BEAD  [BEADC1608X95N]  57.15,60.51 90 bottom
FB11  FERRITE_BEAD  [BEADC1608X95N]  84.71,78.87 0 bottom
FB12  FERRITE_BEAD  [BEADC1608X95N]  86.87,90.8 0 bottom
FB13  FERRITE_BEAD  [BEADC1608X95N]  84.71,64.01 0 bottom
FB14  FERRITE_BEAD  [BEADC1608X95N]  53.85,76.96 180 bottom
J1  3A/250V  [B2B-XH-A]  130.71,33.27 270 top
JP1  PINHD-1X6/90  [1X06/90]  37.85,109.98 0 top
JP3  PINHD-2X3/90  [2X03/90]  125.64,58.83 90 top
JP4  PINHD-1X8/90  [1X08/90]  80.08,101.82 180 top
JP5  PINHD-1X6/90  [1X06/90]  80.21,96.09 180 top
JP6  PINHD-1X8/90  [1X08/90]  60.52,96.03 180 top
JP7  PINHD-1X7/90  [1X07/90]  60.09,109.56 0 top
JP9  PINHD-2X4/90  [2X04/90]  18.49,89.12 270 top
JP10  PINHD-1X4  [1X04]  95.63,100.62 0 top
JP11  PINHD-2X4/90  [2X04/90]  48.39,16.76 0 top
JP12  PINHD-1X1  [1X01]  95.25,96.65 0 top
JP13  PINHD-2X4/90  [2X04/90]  125.63,49.32 90 top
JP14  PINHD-2X4/90  [2X04/90]  124.94,86.34 90 top
JP15  PINHD-2X4/90  [2X04/90]  84.71,17.27 0 top
JP16  PINHD-2X3/90  [2X03/90]  58.72,16.73 0 top
JP17  PINHD-2X4/90  [2X04/90]  14.63,53.17 270 top
JP18  PINHD-2X3/90  [2X03/90]  18.38,79.99 270 top
JP19  PINHD-1X2/90  [1X02/90]  19.18,70.74 0 top
JP20  PINHD-1X2/90  [1X02/90]  27.68,94.71 180 top
JP21  PINHD-1X2/90  [1X02/90]  74.93,18.55 180 top
JP22  PINHD-1X2/90  [1X02/90]  41.61,19.3 180 top
JP23  PINHD-1X2/90  [1X02/90]  121.43,76.8 270 top
JP24  PINHD-1X2/90  [1X02/90]  119.41,46.4 270 top
R1  1k  [RESC1608X60]  79.38,84.18 0 top
R2  470k  [RESC1608X60]  67.46,86.48 90 bottom
R3  1M  [RESC1608X60]  25.32,64.9 0 bottom
R4  1M  [RESC1608X60]  33.56,93.96 0 bottom
R5  1M  [RESC1608X60]  73.02,29.44 270 bottom
R6  1M  [RESC1608X60]  110.24,73.91 180 bottom
R7  1M  [RESC1608X60]  111.6,44.46 180 bottom
R8  1M  [RESC1608X60]  44.2,28.96 270 bottom
R9  10k  [RESC1608X60]  79.38,82.58 0 bottom
R10  1M  [RESC1608X60]  69.6,90.8 0 bottom
RN1  CAY16-2201F4LF  [RESCAF80P320X160X60-8N]  19.56,50.8 0 top
RN2  CAY16-2201F4LF  [RESCAF80P320X160X60-8N]  19.43,55.75 0 top
RN3  CAY16-2201F4LF  [RESCAF80P320X160X60-8N]  25.02,78.87 0 top
RN4  CAY16-2201F4LF  [RESCAF80P320X160X60-8N]  25.02,84.71 0 top
RN5  CAY16-2201F4LF  [RESCAF80P320X160X60-8N]  86.11,20.83 90 top
RN6  CAY16-2201F4LF  [RESCAF80P320X160X60-8N]  82.04,20.83 90 top
RN7  CAY16-2201F4LF  [RESCAF80P320X160X60-8N]  59.44,20.83 90 top
RN8  CAY16-2201F4LF  [RESCAF80P320X160X60-8N]  53.72,21.08 90 top
RN9  CAY16-2201F4LF  [RESCAF80P320X160X60-8N]  118.19,88.52 180 top
RN10  CAY16-2201F4LF  [RESCAF80P320X160X60-8N]  118.24,83.69 180 top
RN11  CAY16-2201F4LF  [RESCAF80P320X160X60-8N]  119.38,58.8 180 top
RN12  CAY16-2201F4LF  [RESCAF80P320X160X60-8N]  119.38,54.23 180 top
RN13  CAY16-2201F4LF  [RESCAF80P320X160X60-8N]  24.13,91.82 0 top
S2  [B3U-3000P(M)-B]  61.85,88.58 180 top
TP1  TP  [1X01']  115.15,33.23 0 top
TP4  TP  [1X01']  62.61,92.07 0 top
TP5  TP  [1X01']  92.96,89.53 0 top
TP7  TP  [1X01']  57.78,55.88 0 top
TP8  TP  [1X01']  104.39,25.53 0 top
TP9  TP  [1X01']  78.94,77.22 0 top
TP10  TP  [1X01']  24.64,31.11 0 top
TP16  TP  [1X01']  14.99,20.83 0 top
TP18  TP  [1X01']  22.86,103.76 0 top
TP19  TP  [1X01']  123.83,100.84 0 top
TP20  TP  [1X01']  115.95,23.75 0 top
TP21  TP  [1X01']  12.45,11.05 0 top
TP22  TP  [1X01']  10.54,20.83 0 top
TP23  TP  [1X01']  102.74,19.94 0 top
TP24  TP  [1X01']  113.66,103.12 0 top
TP25  TP  [1X01']  8.38,40.26 0 top
TP26  TP  [1X01']  76.2,71.5 0 top
TP27  TP  [1X01']  71.63,14.1 0 top
TP28  TP  [1X01']  11.18,100.84 0 top
TP29  TP  [1X01']  82.04,94.87 0 top
TP30  TP  [1X01']  12.88,20.83 0 top
TPCS1  TP  [1X01']  46.23,54.23 0 top
TPCS2  TP  [1X01']  67.69,74.42 0 top
TPCS3  TP  [1X01']  64.75,76.83 0 top
TPCS4  TP  [1X01']  62.36,48.51 0 top
TPCS5  TP  [1X01']  89.53,88.77 0 top
TPCS6  TP  [1X01']  89.92,58.67 0 top
TPCS7  TP  [1X01']  24.64,34.04 0 top
TPCS8  TP  [1X01']  46.86,101.09 0 top
TPCS9  TP  [1X01']  44.96,99.69 0 top
TPRAW  TP  [1X01']  113.92,39.88 0 top
U1  ADS1194CPAG  [QFP50P1200X1200X120-64N]  82.55,34.8 90 top
U2  ADS1194CPAG  [QFP50P1200X1200X120-64N]  54.1,34.8 90 top
U3  ADS1194CPAG  [QFP50P1200X1200X120-64N]  104.01,83.82 180 top
U4  ADS1194CPAG  [QFP50P1200X1200X120-64N]  32.64,55.75 0 top
U5  ADS1194CPAG  [QFP50P1200X1200X120-64N]  104.27,55.25 180 top
U6  LM2664M6  [SOT95P280X145-6N]  103.61,35.94 180 bottom
U7  ADS1194CPAG  [QFP50P1200X1200X120-64N]  40.13,83.94 0 top
U8  PIC32MX250F128D-I_PT  [QFP44_10X10MC]  71.63,83 90 top
U9  MCP1754T-5002E/MC  [SON50P200X300X100-9N]  111.89,35.31 0 top
U10  TPS72325QDBVRQ1  [SOT95P280X145-5N]  101.85,30.1 0 top
U11  TLV70012QDCKRQ1  [SOT65P210X110-5N]  108.2,30.35 0 top
U13  TPD4E1B06DRLR  [SOT50P160X60-6N]  14.86,50.29 90 top
U14  TPD4E1B06DRLR  [SOT50P160X60-6N]  14.73,55.75 90 top
U15  TPD4E1B06DRLR  [SOT50P160X60-6N]  19.05,78.61 90 top
U16  TPD4E1B06DRLR  [SOT50P160X60-6N]  19.04,83.69 90 top
U17  TPD4E1B06DRLR  [SOT50P160X60-6N]  86.23,17.14 180 top
U18  TPD4E1B06DRLR  [SOT50P160X60-6N]  82.17,17.14 180 top
U19  TPD4E1B06DRLR  [SOT50P160X60-6N]  59.56,17.14 180 top
U20  TPD4E1B06DRLR  [SOT50P160X60-6N]  53.34,17.4 180 top
U21  TPD4E1B06DRLR  [SOT50P160X60-6N]  123.09,88.24 270 top
U22  TPD4E1B06DRLR  [SOT50P160X60-6N]  123.19,83.95 270 top
U23  TPD4E1B06DRLR  [SOT50P160X60-6N]  123.86,58.93 270 top
U24  TPD4E1B06DRLR  [SOT50P160X60-6N]  124.12,54.48 270 top
U25  TPD4E1B06DRLR  [SOT50P160X60-6N]  19.81,92.2 270 top
U26  LIS3DHHTRQFN_ICLX_STM  [QFN_ICLX_STM]  13.03,31.37 90 top
XTAL1  8M  [XTALRR488W45L1150T500H350B]  70.87,94.59 180 top

## Library data of the parts
C1-C4 C6-C13 C15-C17 C19-C29 C31-C34 C36-C46 C48-C50 C52-C59 C61-C63 C65-C72 C74-C76 C78-C84 C87-C102 C105 C111-C125 C132-C248 C250-C259 = Capacitor; CATEGORY: Capacitor
C5 C14 C18 C30 C35 C47 C51 C60 C64 C73 C77 C85 C86 = 293D106X0016A2TE3; COPYRIGHT: Copyright (C) 2023 Ultra Librarian. All rights reserved.; MANUFACTURER_PART_NUMBER: 293D106X0016A2TE3; MFR_NAME: Vishay
C103 C104 C106-C110 C126-C131 = CKCL44X7R1H102M085AA; COPYRIGHT: Copyright (C) 2023 Ultra Librarian. All rights reserved.; MANUFACTURER_PART_NUMBER: CKCL44X7R1H102M085AA; MFR_NAME: TDK
CR1 = bat85; COPYRIGHT: Copyright (C) 2023 Ultra Librarian. All rights reserved.; MANUFACTURER_PART_NUMBER: BAT85,113; MFR_NAME: Nexperia
FB1-FB14 = Filter; CATEGORY: Filter; SUB-CATEGORY: Ferrite bead
J1 = Connector; CATEGORY: CONNECTOR; DESCRIPTION: 2.5mm pitch/disconnectable crimp style connector; MANUFACTURER: JST (XH CONNECTOR); MPN: B2B-XH-A; OPERATING_TEMPERATURE: -25°C ~ 85°C; PART_STATUS: ACTIVE; ROHS_COMPLIANT: COMPLIANT; SERIES: B_B-XH-A; SUB_CATEGORY: Through hole connector; TYPE: top entry
JP1 JP3-JP7 JP9-JP24 = Connector; CATEGORY: CONNECTOR; SUB-CATEGORY: PIN-HEADER
R1-R10 = Resistor; CATEGORY: Resistor; SUB-CATEGORY: Fixed
RN1-RN13 = CAY16-2201F4LF (1); MANUFACTURER: Bourns; STANDARD: IPC-7351B
S2 = Switch; CATEGORY: SWITCH; DESCRIPTION: Ultra-small Surface-mounting Tactile Switches with High Contact Reliability; MANUFACTURER: OMRON; OPERATING_TEMPERATURE: -25°C to +70°C; PART_STATUS: ACTIVE; ROHS_COMPLIANCE: RoHS Compliant; SERIES: B3U; TYPE: Tactile
TP1 TP4 TP5 TP7-TP10 TP16 TP18-TP30 TPCS1-TPCS9 TPRAW = BASIC_Components
U1-U5 U7 = ADS1194CPAG
U6 = LM2664M6
U8 = PIC32MX250F128D-I_PT
U9 = MCP1754T-5002E_MC; MANUFACTURER: Microchip; PACKAGE: SON50P200X300X100-9N
U10 = TPS72325QDBVRQ1; MANUFACTURER: Texas Instruments; PACKAGE: SOT95P280X145-5N
U11 = TLV70012QDCKRQ1; MANUFACTURER: Texas Instruments; PACKAGE: SOT65P210X110-5N
U13-U25 = TPD4E1B06DRLR
U26 = LIS3DHHTR; COPYRIGHT: Copyright (C) 2023 Ultra Librarian. All rights reserved.; MANUFACTURER_PART_NUMBER: LIS3DHHTR; MFR_NAME: STMicroelectronics
XTAL1 = Frequency-Source; CATEGORY: Frequency-Source; SUB-CATEGORY: Crystal-2Pin

## Nets
1N: JP17.7 RN1.3 U13.1
1P: JP17.8 RN1.4 U13.3
2N: JP17.5 RN1.1 U13.4
2P: JP17.6 RN1.2 U13.6
3N: JP17.3 RN2.3 U14.1
3P: JP17.4 RN2.4 U14.3
4N: JP17.1 RN2.1 U14.4
4P: JP17.2 RN2.2 U14.6
5N: JP18.5 RN3.3 U15.1
5P: JP18.6 RN3.4 U15.3
6N: JP18.3 RN3.1 U15.4
6P: JP18.4 RN3.2 U15.6
7N: JP18.1 RN4.3 U16.1
7P: JP18.2 RN4.4 U16.3
8N: JP9.7 RN4.1 U16.4
8P: JP9.8 RN4.2 U16.6
9N: JP15.7 RN5.3 U17.1
9P: JP15.8 RN5.4 U17.3
10N: JP15.5 RN5.1 U17.4
10P: JP15.6 RN5.2 U17.6
11N: JP15.3 RN6.3 U18.1
11P: JP15.4 RN6.4 U18.3
12N: JP15.1 RN6.1 U18.4
12P: JP15.2 RN6.2 U18.6
13N: JP16.5 RN7.3 U19.1
13P: JP16.6 RN7.4 U19.3
14N: JP16.3 RN7.1 U19.4
14P: JP16.4 RN7.2 U19.6
15N: JP16.1 RN8.3 U20.1
15P: JP16.2 RN8.4 U20.3
16N: JP11.7 RN8.1 U20.4
16P: JP11.8 RN8.2 U20.6
17N: JP14.7 RN9.3 U21.1
17P: JP14.8 RN9.4 U21.3
18N: JP14.5 RN9.1 U21.4
18P: JP14.6 RN9.2 U21.6
19N: JP14.3 RN10.3 U22.1
19P: JP14.4 RN10.4 U22.3
20N: JP14.1 RN10.1 U22.4
20P: JP14.2 RN10.2 U22.6
21N: JP3.5 RN11.3 U23.1
21P: JP3.6 RN11.4 U23.3
22N: JP3.3 RN11.1 U23.4
22P: JP3.4 RN11.2 U23.6
23N: JP3.1 RN12.3 U24.1
23P: JP3.2 RN12.4 U24.3
24N: JP13.7 RN12.1 U24.4
24P: JP13.8 RN12.2 U24.6
-RAW: C51.2 C89.1 U6.2 U10.1 U10.2
AGND: C1.2 C6.2 C11.2 C12.2 C18.1 C19.2 C20.2 C27.2 C28.2 C35.1 C36.2 C37.2 C38.2 C44.2 C45.2 C51.1 C52.2 C53.2 C57.2 C58.2 C65.2 C66.2 C70.2 C71.2 C78.2 C79.2 C80.2 C87.2 C89.2 C90.2 C95.2 C96.2 C97.2 C98.2 C99.2 C100.2 C103.1 C103.2 C103.3 C103.4 C104.1 C104.2 C104.3 C104.4 C105.2 C106.1 C106.2 C106.3 C106.4 C107.1 C107.2 C107.3 C107.4 C108.1 C108.2 C108.3 C108.4 C109.1 C109.2 C109.3 C109.4 C110.1 C110.2 C110.3 C110.4 C112.1 C116.2 C118.2 C120.2 C123.2 C124.2 C125.2 C126.1 C126.2 C126.3 C126.4 C127.1 C127.2 C127.3 C127.4 C128.1 C128.2 C128.3 C128.4 C129.1 C129.2 C129.3 C129.4 C130.1 C130.2 C130.3 C130.4 C131.1 C131.2 C131.3 C131.4 C131.6 C131.7 C131.8 C132.2 C133.2 C134.2 C135.2 C137.2 C138.2 C139.2 C140.2 C141.2 C142.2 C143.2 C144.2 C145.2 C146.2 C147.2 C148.2 C149.2 C152.2 C155.2 C156.2 C157.2 C158.2 C159.2 C160.2 C161.2 C162.2 C163.2 C164.2 C165.2 C166.2 C169.2 C170.2 C171.2 C172.2 C173.2 C174.2 C175.2 C176.2 C177.2 C178.2 C179.2 C180.2 C181.2 C182.2 C183.2 C184.2 C185.2 C186.2 C187.2 C188.2 C189.2 C190.2 C191.2 C192.2 C193.2 C194.2 C195.2 C196.2 C197.2 C198.2 C199.2 C200.2 C201.2 C202.2 C203.2 C204.2 C205.2 C206.2 C207.2 C208.2 C209.2 C210.2 C211.2 C212.2 C213.2 C214.2 C215.2 C216.2 C217.2 C218.2 C219.2 C220.2 C221.2 C222.2 C223.2 C224.2 C225.2 C226.2 C227.2 C228.2 C229.2 C230.2 C231.2 C232.2 C233.2 C234.2 C235.2 C236.2 C237.2 C238.2 C239.2 C240.2 C241.2 C242.2 C243.2 C244.2 C245.2 C246.2 C247.2 C248.2 FB1.1 FB2.1 FB3.1 FB4.1 FB5.1 FB6.1 FB7.1 FB8.1 FB9.1 FB10.1 FB11.1 FB12.1 FB13.1 FB14.1 J1.2 JP5.4 JP7.3 JP9.3 JP9.4 JP11.3 JP11.4 JP13.3 JP13.4 RN13.2 RN13.3 RN13.4 RN13.5 RN13.6 RN13.7 TP18.1 TP19.1 TP20.1 TP21.1 U6.1 U8.16 U9.4 U10.3 U11.2 U13.2 U14.2 U15.2 U16.2 U17.2 U18.2 U19.2 U20.2 U21.2 U22.2 U23.2 U24.2 U25.2 U25.4
AVDD: C1.1 C11.1 C12.1 C18.2 C27.1 C28.1 C44.1 C45.1 C57.1 C58.1 C70.1 C71.1 C100.1 C116.1 C120.1 C133.1 C134.1 C135.1 C137.1 C143.1 C144.1 C145.1 C146.1 C147.1 C148.1 C149.1 C159.1 C160.1 C161.1 C162.1 C163.1 C164.1 C165.1 C166.1 C209.1 C210.1 C211.1 C212.1 C213.1 C214.1 C215.1 C216.1 C217.1 C218.1 C219.1 C220.1 C221.1 C222.1 C223.1 C224.1 C225.1 C226.1 C227.1 C228.1 C229.1 C230.1 C231.1 C232.1 C233.1 C234.1 C235.1 C236.1 C237.1 C238.1 C239.1 C240.1 C241.1 C242.1 C243.1 C244.1 C245.1 C246.1 C247.1 C248.1 JP9.1 JP9.2 JP11.1 JP11.2 JP13.1 JP13.2 TP1.1 U1.1 U1.2 U1.3 U1.4 U1.5 U1.6 U1.7 U1.8 U1.19 U1.21 U1.22 U1.54 U1.56 U1.59 U2.1 U2.2 U2.3 U2.4 U2.5 U2.6 U2.7 U2.8 U2.19 U2.21 U2.22 U2.54 U2.56 U2.59 U3.1 U3.2 U3.3 U3.4 U3.5 U3.6 U3.7 U3.8 U3.19 U3.21 U3.22 U3.54 U3.56 U3.59 U4.1 U4.2 U4.3 U4.4 U4.5 U4.6 U4.7 U4.8 U4.19 U4.21 U4.22 U4.54 U4.56 U4.59 U5.1 U5.2 U5.3 U5.4 U5.5 U5.6 U5.7 U5.8 U5.19 U5.21 U5.22 U5.54 U5.56 U5.59 U7.1 U7.2 U7.3 U7.4 U7.5 U7.6 U7.7 U7.8 U7.19 U7.21 U7.22 U7.54 U7.56 U7.59 U11.5 U25.3
AVSS: C2.1 C3.2 C5.2 C6.1 C7.2 C8.2 C10.2 C13.1 C14.2 C15.2 C16.2 C17.2 C19.1 C20.1 C25.2 C26.2 C29.1 C30.2 C31.2 C32.2 C33.2 C34.2 C35.2 C36.1 C37.1 C38.1 C42.2 C43.2 C46.1 C47.2 C48.2 C49.2 C50.2 C52.1 C53.1 C59.1 C60.2 C61.2 C62.2 C63.2 C65.1 C66.1 C68.2 C69.2 C72.1 C73.2 C74.2 C75.2 C76.2 C78.1 C79.1 C80.1 C84.2 C90.1 C94.2 C95.1 C96.1 C97.1 C99.1 C101.2 C102.2 C105.1 C118.1 C119.2 C121.2 C122.2 C123.1 C124.1 C125.1 C136.2 C138.1 C139.1 C140.1 C141.1 C142.1 C152.1 C153.2 C154.2 C155.1 C156.1 C157.1 C158.1 C169.1 C170.1 C171.1 C172.1 C173.1 C174.1 C175.1 C176.1 C177.1 C178.1 C179.1 C180.1 C181.1 C182.1 C183.1 C184.1 C185.1 C186.1 C187.1 C188.1 C189.1 C190.1 C191.1 C192.1 C193.1 C194.1 C195.1 C196.1 C197.1 C198.1 C199.1 C200.1 C201.1 C202.1 C203.1 C204.1 C205.1 C206.1 C207.1 C208.1 TP8.1 U1.20 U1.23 U1.25 U1.32 U1.53 U1.57 U1.58 U2.20 U2.23 U2.25 U2.32 U2.53 U2.57 U2.58 U3.20 U3.23 U3.25 U3.32 U3.53 U3.57 U3.58 U4.20 U4.23 U4.25 U4.32 U4.53 U4.57 U4.58 U5.20 U5.23 U5.25 U5.32 U5.53 U5.57 U5.58 U7.20 U7.23 U7.25 U7.32 U7.53 U7.57 U7.58 U10.4 U25.1
BIAS: JP9.5 JP9.6 JP11.5 JP11.6 JP13.5 JP13.6 RN13.1 U25.6
BIAS_ESD: C131.5 RN13.8 U1.60 U2.60 U3.60 U4.60 U5.60 U7.60
BOOT_EN: R2.2 S2.1 U8.33
CLK: JP6.6 JP12.1 U1.37 U2.37 U3.37 U4.37 U5.37 U7.37
CS1: TPCS1.1 U4.39 U8.15
CS2: TPCS2.1 U7.39 U8.1
CS3: TPCS3.1 U1.39 U8.44
CS4: TPCS4.1 U2.39 U8.43
CS5: TPCS5.1 U3.39 U8.21
CS6: TPCS6.1 U5.39 U8.22
CS7: TPCS7.1 U8.34 U26.4
CS8: JP7.1 TPCS8.1 U8.35
CS9: JP6.8 TPCS9.1 U8.38
DGND: C4.2 C9.2 C21.2 C22.2 C23.2 C39.2 C40.2 C55.2 C56.2 C77.1 C81.2 C82.2 C85.2 C86.1 C88.2 C91.2 C92.2 C111.2 C113.2 C114.2 C115.2 C117.1 C150.2 C151.2 C167.2 C168.2 C250.2 C251.2 C252.2 C253.2 C254.2 C255.2 C256.2 C257.2 C258.2 C259.2 FB1.2 FB2.2 FB3.2 FB4.2 FB5.2 FB6.2 FB7.2 FB8.2 FB9.2 FB10.2 FB11.2 FB12.2 FB13.2 FB14.2 JP4.5 JP6.2 JP7.6 R2.1 TP22.1 TP23.1 TP24.1 TP25.1 TP26.1 TP27.1 TP28.1 TP29.1 U1.31 U1.33 U1.41 U1.49 U1.51 U2.31 U2.33 U2.41 U2.49 U2.51 U3.31 U3.33 U3.41 U3.49 U3.51 U4.31 U4.33 U4.41 U4.49 U4.51 U5.31 U5.33 U5.41 U5.49 U5.51 U7.31 U7.33 U7.41 U7.49 U7.51 U8.6 U8.29 U8.39 U26.9 U26.10 U26.11 U26.12 U26.13 U26.14 U26.15 U26.16
DRDY1: U4.47 U8.19
DRDY2: U7.47 U8.2
DRDY3: U1.47 U8.3
DRDY4: U2.47 U8.4
DRDY5: U3.47 U8.5
DRDY6: U5.47 U8.23
DVDD: C4.1 C9.1 C21.1 C22.1 C23.1 C39.1 C40.1 C55.1 C56.1 C77.2 C81.1 C82.1 C86.2 C88.1 C91.1 C92.1 C112.2 C113.1 C117.2 C132.1 C150.1 C151.1 C167.1 C168.1 C250.1 C251.1 C252.1 C253.1 C254.1 C255.1 C256.1 C257.1 C258.1 C259.1 JP4.4 JP6.1 JP7.4 R9.2 S2.2 TP4.1 U1.48 U1.50 U1.52 U2.48 U2.50 U2.52 U3.48 U3.50 U3.52 U4.48 U4.50 U4.52 U5.48 U5.50 U5.52 U6.4 U6.5 U7.48 U7.50 U7.52 U8.10 U8.17 U8.28 U8.40 U9.1 U11.1 U11.3 U26.7 U26.8
EN: JP5.6 U8.26
IN1N: C103.7 RN1.6 U4.15
IN1P: C103.8 RN1.5 U4.16
IN2N: C103.5 RN1.8 U4.13
IN2P: C103.6 RN1.7 U4.14
IN3N: C104.7 RN2.6 U4.11
IN3P: C104.8 RN2.5 U4.12
IN4N: C104.5 RN2.8 U4.9
IN4P: C104.6 RN2.7 U4.10
IN5N: C106.7 RN3.6 U7.15
IN5P: C106.8 RN3.5 U7.16
IN6N: C106.5 RN3.8 U7.13
IN6P: C106.6 RN3.7 U7.14
IN7N: C107.7 RN4.6 U7.11
IN7P: C107.8 RN4.5 U7.12
IN8N: C107.5 RN4.8 U7.9
IN8P: C107.6 RN4.7 U7.10
IN9N: C108.6 RN5.6 U1.15
IN9P: C108.5 RN5.5 U1.16
IN10N: C108.8 RN5.8 U1.13
IN10P: C108.7 RN5.7 U1.14
IN11N: C109.6 RN6.6 U1.11
IN11P: C109.5 RN6.5 U1.12
IN12N: C109.8 RN6.8 U1.9
IN12P: C109.7 RN6.7 U1.10
IN13N: C110.6 RN7.6 U2.15
IN13P: C110.5 RN7.5 U2.16
IN14N: C110.8 RN7.8 U2.13
IN14P: C110.7 RN7.7 U2.14
IN15N: C126.6 RN8.6 U2.11
IN15P: C126.5 RN8.5 U2.12
IN16N: C126.8 RN8.8 U2.9
IN16P: C126.7 RN8.7 U2.10
IN17N: C127.6 RN9.6 U3.15
IN17P: C127.5 RN9.5 U3.16
IN18N: C127.8 RN9.8 U3.13
IN18P: C127.7 RN9.7 U3.14
IN19N: C128.6 RN10.6 U3.11
IN19P: C128.5 RN10.5 U3.12
IN20N: C128.8 RN10.8 U3.9
IN20P: C128.7 RN10.7 U3.10
IN21N: C129.6 RN11.6 U5.15
IN21P: C129.5 RN11.5 U5.16
IN22N: C129.8 RN11.8 U5.13
IN22P: C129.7 RN11.7 U5.14
IN23N: C130.6 RN12.6 U5.11
IN23P: C130.5 RN12.5 U5.12
IN24N: C130.8 RN12.8 U5.9
IN24P: C130.7 RN12.7 U5.10
INT1: U8.41 U26.6
MCLR': JP4.1 R1.1 U8.18
MISO: JP6.3 JP7.7 TP9.1 TP10.1 U1.43 U2.43 U3.43 U4.43 U5.43 U7.43 U8.9 U26.3
MOSI: JP6.7 JP7.2 TP5.1 TP7.1 TP16.1 U1.34 U2.34 U3.34 U4.34 U5.34 U7.34 U8.20 U26.2
N$2: C119.1 U4.26
N$3: C3.1 C8.1 U4.55
N$4: C121.1 U4.30
N$5: C101.1 U4.28
N$7: C15.1 C16.1 U7.55
N$8: C17.1 U7.30
N$9: C154.1 U7.28
N$10: CR1.2 J1.1
N$12: C31.1 C32.1 U1.55
N$13: C34.1 U1.30
N$14: C102.1 U1.28
N$17: C48.1 C49.1 U2.55
N$18: C50.1 U2.30
N$19: C153.1 U2.28
N$22: C61.1 C62.1 U3.55
N$23: C63.1 U3.30
N$24: C122.1 U3.28
N$25: C42.1 U1.64
N$27: C74.1 C75.1 U5.55
N$28: C76.1 U5.30
N$29: C136.1 U5.28
N$31: C98.1 U10.5
N$32: C64.2 U6.6
N$33: C64.1 U6.3
N$35: C115.1 R10.1 U8.30 XTAL1.1
N$36: C2.2 C5.1 U4.24
N$37: C114.1 R10.2 U8.31 XTAL1.2
N$38: C111.1 R1.2 R9.1
N$39: C85.1 U8.7
N$40: C25.1 U7.64
N$41: C10.1 U7.26
N$42: C26.1 U1.26
N$43: C68.1 U2.64
N$44: C43.1 U2.26
N$45: C84.1 U5.64
N$47: C69.1 U5.26
N$48: C13.2 C14.1 U7.24
N$49: C94.1 U3.64
N$51: C33.1 U3.26
N$52: C46.2 C47.1 U2.24
N$53: C72.2 C73.1 U5.24
N$54: C59.2 C60.1 U3.24
N$55: C29.2 C30.1 U1.24
N$61: C7.1 U4.64
PGEC: JP4.2 U8.13
PGED: JP4.3 U8.12
RAW: C87.1 CR1.1 JP5.5 TPRAW.1 U9.5 U9.8
RESET: JP6.5 U1.36 U2.36 U3.36 U4.36 U5.36 U7.36 U8.8
RLDIN1: JP19.1 U4.62
RLDIN2: JP20.1 U7.62
RLDIN3: JP21.1 U1.62
RLDIN4: JP22.1 U2.62
RLDIN5: JP23.1 U3.62
RLDIN6: JP24.1 U5.62
RLDINV1: C54.2 JP1.1 R3.1 U4.61
RLDINV2: C24.2 JP1.2 R4.1 U7.61
RLDINV3: C41.2 JP1.3 R5.1 U1.61
RLDINV4: C67.2 JP1.4 R8.1 U2.61
RLDINV5: C93.2 JP1.5 R6.1 U3.61
RLDINV6: C83.2 JP1.6 R7.1 U5.61
RLDOUT1: C54.1 JP19.2 R3.2 U4.63
RLDOUT2: C24.1 JP20.2 R4.2 U7.63
RLDOUT3: C41.1 JP21.2 R5.2 U1.63
RLDOUT4: C67.1 JP22.2 R8.2 U2.63
RLDOUT5: C93.1 JP23.2 R6.2 U3.63
RLDOUT6: C83.1 JP24.2 R7.2 U5.63
RPA8: JP10.1 U8.32
RPC2: JP10.2 U8.27
RPC3: JP10.3 U8.36
RPC4: JP10.4 U8.37
RXD: JP5.2 U8.11
SCLK: JP6.4 JP7.5 TP30.1 U1.40 U2.40 U3.40 U4.40 U5.40 U7.40 U8.14 U26.1
START: U1.38 U2.38 U3.38 U4.38 U5.38 U7.38 U8.25
STATE: JP5.1
TXD: JP5.3 U8.24
VBUS: U8.42

## Tracks (layer width: path | path; a pad name or v marks a point on that pad's centre or on a via)
1N
  Top 0.152: RN1.3 19.45,50.4 19.56,50.29 19.56,49.15 18.16,47.75 14.6,47.75 14.1,48.25 14.1,48.9 14.36,49.16 U13.1 14.18,49.74 11.87,49.74 11.24,50.37 9.29,50.37 JP17.7
1P  (via drill 0.35, 0.35 layers 1-2)
  Top 0.152: RN1.4 18.6,49.68 15.49,49.68 U13.3 15.37,49.55 15.37,48.69 v15.67,48.39 | JP17.8 12.42,47.75 13.71,47.75 v13.9,47.56
  Route2 0.152: v13.9,47.56 14.23,47.88 14.99,47.88 15.5,48.39 v15.67,48.39
2N
  Top 0.152: U13.4 | U13.4 16.59,52.25 18.43,52.25 RN1.1 | U13.4 15.27,50.94 15.27,50.59 15.12,50.44 11.63,50.44 11.37,50.7 9.47,50.7 JP17.5
2P
  Top 0.152: RN1.2 19.45,51.2 19.56,51.31 19.56,52.58 19.55,52.58 16.01,52.58 15.75,52.33 14.55,52.33 14.32,52.1 14.32,51.06 U13.6 11.69,51.03 JP17.6
3N
  Top 0.152: RN2.3 19.32,55.35 19.43,55.25 19.43,54.1 18.55,53.22 16.13,53.22 15.75,53.59 15.23,53.59 14.99,53.36 14.47,53.36 14.1,53.73 14.1,54.51 14.23,54.64 U14.1 13.75,55.5 9.34,55.5 JP17.3
3P  (via drill 0.35, 0.35 layers 1-2)
  Top 0.152: RN2.4 17.71,54.55 16.89,55.37 15.59,55.37 U14.3 v16.26,53.99 v16.26,53.98 | JP17.4 12.22,53.03 15.42,53.03 v15.49,52.96
  Route2 0.152: v15.49,52.96 16.26,53.73 v16.26,53.98
4N
  Top 0.152: RN2.1 15.7,56.95 U14.4 15.14,56.4 15.14,56.05 14.99,55.9 13.71,55.9 13.66,55.95 9.3,55.95 JP17.1
4P
  Top 0.152: RN2.2 19.2,56.15 19.3,56.26 19.3,57.66 19.05,57.91 15.31,57.91 14.32,56.92 14.32,56.58 U14.6 11.3,56.49 JP17.2
5N
  Top 0.152: RN3.3 24.78,78.47 25.02,78.23 25.02,77.22 23.88,76.08 19.42,76.08 18.55,76.95 U15.1 18.21,78.21 15.24,78.21 14.99,78.47 13.04,78.47 JP18.5
5P  (via drill 0.35 layers 1-2)
  Top 0.152: v20.83,76.71 20.83,76.73 20.7,76.73 U15.3 19.9,78.23 20.83,78.23 21.39,77.67 RN3.4 | JP18.6 15.95,76.07 18.53,76.07 v18.98,75.62
  Route2 0.152: v20.83,76.71 20.19,76.07 19.43,76.07 v18.98,75.62
6N
  Top 0.152: RN3.1 24.02,79.94 20.14,79.94 U15.4 19.55,78.86 19.45,78.76 15.16,78.76 15.12,78.8 13.22,78.8 JP18.3
6P
  Top 0.152: RN3.2 24.78,79.27 25.02,79.5 25.02,80.52 24.95,80.59 18.99,80.59 18.55,80.14 U15.6 15.21,79.35 JP18.4
7N
  Top 0.152: RN4.3 24.91,84.31 25.02,84.2 25.02,83.06 22.88,80.92 19.28,80.92 18.49,81.7 18.49,82.36 18.54,82.41 U16.1 18.2,83.29 15.24,83.29 14.99,83.55 13.04,83.55 JP18.1
7P  (via drill 0.35 layers 1-2)
  Top 0.152: RN4.4 23.89,83.25 19.84,83.25 U16.3 19.88,82.62 19.88,81.76 v20.09,81.55 | JP18.2 15.95,81.15 18.15,81.15 v18.15,81.15
  Route2 0.152: v18.15,81.15 18.21,81.21 19.75,81.21 v20.09,81.55
8N
  Top 0.152: RN4.1 23.89,85.66 20.77,85.66 U16.4 19.54,83.93 19.45,83.84 15.16,83.84 15.12,83.88 13.58,83.88 JP9.7
8P
  Top 0.152: U16.6 18.54,84.45 | RN4.2 24.91,85.11 25.02,85.22 25.02,86.36 24.77,86.61 20.38,86.61 18.63,84.86 18.63,84.55 18.54,84.45 | 18.54,84.45 15.54,84.45 JP9.8
9N
  Top 0.152: JP15.7 87.35,12.09 87.35,16.26 U17.1 86.88,16.74 86.53,16.74 86.38,16.88 86.38,19.86 86.48,19.95 RN5.3
9P
  Top 0.152: 87.5,17.64 U17.3 | 87.5,17.64 87.18,17.97 87.18,19.83 RN5.4 | JP15.8 88.52,16.63 88.64,16.76 88.64,17.28 88.27,17.65 87.75,17.65 87.74,17.64 87.5,17.64
10N
  Top 0.152: RN5.1 84.78,19.83 84.78,17.98 85.12,17.64 U17.4 85.15,17.64 84.91,17.41 84.91,11.99 JP15.5
10P  (via drill 0.35 layers 1-2)
  Top 0.152: JP15.6 85.5,13.94 U17.6 | v88.65,19.81 88.65,20.32 88.14,20.83 86.11,20.83 85.71,20.43 RN5.2
  Route2 0.152: JP15.6 85.98,16.64 88.65,19.3 v88.65,19.81
11N
  Top 0.152: JP15.3 82.3,12.06 82.3,15.66 82.9,16.27 U18.1 82.81,16.74 82.47,16.74 82.32,16.88 82.32,19.86 82.42,19.95 RN6.3
11P
  Top 0.152: 83.45,17.64 U18.3 | 83.45,17.64 83.37,17.72 83.37,19.83 RN6.4 | 83.45,17.64 83.82,17.27 84.18,17.27 84.55,16.9 84.55,14.57 JP15.4
12N
  Top 0.152: 80.69,19.8 80.77,19.8 80.77,17.64 U18.4 | JP15.1 80.9,12.02 79.88,13.04 79.88,19.05 80.64,19.8 80.69,19.8 | 80.69,19.8 RN6.1
12P  (via drill 0.35 layers 1-2)
  Top 0.152: JP15.2 81.43,14 U18.6 | v79.5,20.07 80.26,20.83 81.28,20.83 81.64,20.47 RN6.2
  Route2 0.152: JP15.2 79.5,14.86 v79.5,20.07
13N  (via drill 0.35 layers 1-2)
  Top 0.152: JP16.5 59.99,11.65 59.99,15.25 60.42,15.68 60.42,16.52 U19.1 60.26,16.61 | RN7.3 60.12,20.23 60.12,20.5 60.3,20.69 60.97,20.69 62.48,19.18 v62.61,19.18
  Route2 0.152: JP16.5 62.61,11.73 v62.61,19.18
13P
  Top 0.152: RN7.4 60.71,19.88 60.71,18.54 60.3,18.13 U19.3 60.39,17.55 61.29,17.55 61.94,16.9 61.94,16.38 61.27,15.7 JP16.6
14N
  Top 0.152: RN7.1 58.11,19.83 58.11,18.36 U19.4 58.28,17.64 57.66,17.02 57.66,12.55 58.72,11.48 JP16.3
14P  (via drill 0.35 layers 1-2)
  Top 0.152: JP16.4 58.83,13.02 U19.6 | v57.15,18.41 56.9,18.67 56.9,20.07 57.66,20.83 58.67,20.83 59.04,20.47 RN7.2
  Route2 0.152: JP16.4 57.02,14.62 57.02,18.29 v57.15,18.41
15N  (via drill 0.35 layers 1-2)
  Top 0.152: RN8.3 54.12,20.89 54.45,21.22 55.36,21.22 55.37,21.21 v56.52,21.21 | JP16.1 56.18,11.48 54.33,13.34 54.33,16.64 U20.1
  Route2 0.152: v56.52,21.21 56.01,20.7 56.01,15.17 57.2,13.98 57.2,12.5 56.18,11.48 JP16.1
15P
  Top 0.152: JP16.2 56.18,16.59 54.86,17.91 U20.3 54.92,18.74 RN8.4
16N
  Top 0.152: RN8.1 52.2,19.88 52.2,18.31 U20.4 52.06,17.9 51.18,17.02 51.18,12.53 52.2,11.52 JP11.7
16P  (via drill 0.35 layers 1-2)
  Top 0.152: JP11.8 51.94,13.21 51.94,16.36 52.48,16.9 U20.6 52.66,16.9 52.7,16.86 | v49.53,21.72 50.16,21.08 53.09,21.08 53.32,20.85 RN8.2
  Route2 0.152: JP11.8 49.53,15.62 v49.53,21.72
17N
  Top 0.152: 123.57,88.97 U21.1 | RN9.3 121.67,88.92 122.46,88.13 123.1,88.13 123.5,88.54 123.5,88.9 123.57,88.97 | 123.57,88.97 123.61,89.01 130.15,89.01 JP14.7
17P
  Top 0.152: RN9.4 121.84,89.72 U21.3 122.55,89.01 122.55,90.43 123.05,90.93 123.58,90.93 124.36,90.15 JP14.8
18N
  Top 0.152: RN9.1 119.13,87.25 122.43,87.25 122.59,87.41 U21.4 122.59,87.16 123.15,86.6 130.28,86.6 JP14.5
18P  (via drill 0.35 layers 1-2)
  Top 0.152: JP14.6 123.7,87.61 U21.6 | RN9.2 118.34,88.12 118.05,87.83 118.05,87.25 119.16,86.14 v120.49,86.14
  Route2 0.152: v120.49,86.14 123.09,86.14 123.18,86.23 127.37,86.23 JP14.6
19N
  Top 0.152: RN10.3 119.24,83.97 123.32,83.97 123.6,84.25 123.6,84.59 U22.1 124.44,83.93 130.15,83.93 JP14.3
19P
  Top 0.152: 122.78,84.59 U22.3 122.65,84.68 | 122.65,84.68 119.59,84.68 119.28,84.99 119.21,84.99 RN10.4 | JP14.4 127.59,86.23 123.18,86.23 122.65,85.7 122.65,84.68
20N
  Top 0.152: RN10.1 119.24,82.37 121.84,82.37 U22.4 122.68,82.17 123.84,81.01 128.66,81.01 130.19,82.53 JP14.1
20P  (via drill 0.35 layers 1-2)
  Top 0.152: U22.6 123.69,83.15 124.43,82.41 128.62,82.41 JP14.2 | v120.52,81.28 119.24,81.28 118.1,82.42 118.1,83.05 118.34,83.29 RN10.2
  Route2 0.152: JP14.2 127.5,81.28 v120.52,81.28
21N
  Top 0.152: JP3.5 130.72,60.1 124.36,60.1 U23.1 124.27,59.57 124.27,59.23 124.12,59.08 123.11,59.08 122.98,59.2 RN11.3
21P
  Top 0.152: RN11.4 120.51,60.25 120.76,60.25 120.79,60.23 121.06,60.23 121.12,60.17 123.24,60.17 123.36,60.04 U23.3 123.36,60.14 123.19,60.32 123.19,60.97 123.6,61.37 JP3.6
22N
  Top 0.152: RN11.1 123.28,57.6 123.36,57.69 U23.4 123.36,57.85 123.61,57.61 130.77,57.61 JP3.3
22P  (via drill 0.35 layers 1-2)
  Top 0.152: JP3.4 128.82,58.19 U23.6 | v121.67,56.52 120.14,56.52 119.38,57.28 119.38,58.04 119.74,58.4 RN11.2
  Route2 0.152: v121.67,56.52 123.69,56.52 124.07,56.89 127.52,56.89 JP3.4
23N
  Top 0.152: JP3.1 130.92,55.22 U24.1 124.53,55.13 124.53,54.78 124.12,54.38 122.09,54.38 121.84,54.63 RN12.3
23P
  Top 0.152: RN12.4 120.51,55.68 123.57,55.68 123.62,55.64 U24.3 123.57,55.26 123.57,56.4 124.07,56.89 128.85,56.89 JP3.2
24N
  Top 0.152: RN12.1 123.53,53.03 123.62,53.11 U24.4 123.62,53.4 124.91,52.11 129.86,52.11 130.87,53.13 JP13.7
24P  (via drill 0.35 layers 1-2)
  Top 0.152: JP13.8 124.62,53.13 U24.6 | RN12.2 119.49,53.83 119.24,53.59 119.24,52.97 120.02,52.2 v121.27,52.2
  Route2 0.152: v121.27,52.2 121.99,52.2 122.93,53.13 JP13.8
-RAW  (via drill 0.35)
  Top 0.254: U10.2 U10.1 100.55,31 98.17,31 C89.1 97.55,31.63 97.53,31.63 96.9,32.25 96.9,34.04 v99.44,36.58
  Bottom 0.254: 99.22,35.02 C51.2 99.08,36.21 v99.44,36.58 100.84,36.58 101.48,35.94 U6.2 | 99.22,35.08 99.22,35.02 | 99.22,35.02 99.64,35.45
AGND  (via drill 0.35, 0.35 layers 1-2)  (5 unrouted)
  Top 0.152: U13.2 14.86,48.64 v14.73,48.51 | U14.2 v14.73,53.99 | U20.2 54.17,17.31 54.51,17.31 54.93,16.89 v54.96,16.89 | U19.2 60.39,17.05 60.73,17.05 61.15,16.64 v61.31,16.64 | U18.2 82.99,17.05 83.34,17.05 83.76,16.64 v83.92,16.64 | U17.2 87.06,17.05 87.97,17.05 v88.01,17.02 | U24.2 124.08,55.25 124.08,55.53 124.33,55.78 v124.33,56.26 | U23.2 123.83,59.7 v123.83,60.71 | U15.2 19.14,77.79 19.14,77.44 19.69,76.9 v19.69,76.71 | U25.4 18.9,91.06 18.29,91.06 | U25.2 19.81,94.36 | U16.2 19.04,82.05 v19.16,81.93
  Top 0.254: C131.6 C131.7 C131.8 28.24,91.42 RN13.6 | RN13.7 RN13.6 | C131.4 C131.3 C131.2 C131.1 | RN13.6 RN13.5 RN13.4 RN13.3 RN13.2 | C112.1 76.17,82.19 U8.16 79.09,82.19 v79.88,81.41 | U9.4 108.84,34.56 C132.2 | JP9.3 JP9.4 | U22.2 123.19,85.34 v123.44,85.6 | U21.2 123.09,89.69 123.32,89.92 v123.32,90.3
  Route2 0.254: v85.85,77.98 85.85,77.47 82.42,77.47 80.9,78.99 80.92,79.01 80.92,79.83 80.57,80.19 80.57,80.72 v79.88,81.41
  Bottom 0.152: C223.2 108.19,82.77 C224.2
  Bottom 0.254: U6.1 102.23,34.87 | C87.2 111.64,35.82 110.47,34.65 C132.2 | 57.62,101.67 57.62,105.68 JP7.3 | FB8.1 47.98,98.46 51.19,101.67 57.62,101.67 | 57.62,101.67 69.85,101.67 69.96,101.56 71.73,101.56 71.9,101.73 77.11,101.73 JP5.4 | C240.2 C239.2 | C215.2 81.41,30.62 C216.2 | C231.2 108.44,52.83 C232.2 | C166.2 27.44,59.56 C165.2
  other vias: 75.69,81.71 108.75,34.65
  pour Top: 53.39,60.31 53.39,85.82 48.45,90.76 48.44,90.79 48.44,107.75 11.33,107.75 4.9,101.31 4.9,14 13.49,5.41 108.05,5.41 134.29,31.65 134.29,101.7 128.37,107.62 87.2,107.62 87.2,90.03 87.19,90 85.04,87.85 85.04,60.31 85.03,60.28 85.01,60.26 84.98,60.25 53.45,60.25 53.42,60.26 53.4,60.28
  pour Bottom: 53.39,60.31 53.39,85.82 48.45,90.76 48.44,90.79 48.44,107.87 11.46,107.87 4.9,101.31 4.9,14 13.37,5.54 108.3,5.54 134.29,31.53 134.29,101.57 128.24,107.62 87.2,107.62 87.2,90.03 87.19,90 85.04,87.85 85.04,60.31 85.03,60.28 85.01,60.26 84.98,60.25 53.45,60.25 53.42,60.26 53.4,60.28
AVDD  (via drill 0.35, 0.35 layers 1-2)  (17 unrouted)
  Top 0.152: 34.45,87.7 29.78,87.7 v29.72,87.76 | U4.8 U4.7 U4.6 U4.5 U4.4 U4.3 U4.2 U4.1 25.33,59.5 v25.27,59.56 | U2.8 U2.7 U2.6 U2.5 U2.4 U2.3 U2.2 U2.1 50.35,27.69 v50.16,27.5 | U1.8 U1.7 U1.6 U1.5 U1.4 U1.3 U1.2 U1.1 78.8,27.49 v78.74,27.43 | U5.8 U5.7 U5.6 U5.5 U5.4 U5.3 U5.2 U5.1 111.32,51.5 v111.63,51.18 | U3.8 U3.7 U3.6 U3.5 U3.4 U3.3 U3.2 U3.1 111.32,80.07 v111.38,80.01 | C143.1 42.95,91.97 41.38,90.4 U7.54
  Top 0.254: U7.21 38.38,77.11 C244.1 | U7.22 38.88,74.88 C241.1 | U7.59 38.88,88.75 v37.74,87.61 37.72,87.59 37.72,86.36 v37.59,86.23 | U4.21 30.89,48.67 30.23,48.01 30.23,46.62 C159.1 | C159.1 28.94,43.81 29.79,43.81 v29.79,44.01 | U4.22 31.39,48.23 C162.1 | U4.54 33.89,62.6 C144.1 | U4.56 32.89,60.19 C163.1 33.51,59.3 v32.64,58.42 | U4.59 31.39,60.6 30.8,60.02 30.67,60.02 C165.1 30.35,59.42 v30.35,57.78 | U2.19 60.67,32.05 61.81,30.91 62.55,30.91 C44.1 C233.1 | U2.21 62.57,33.05 C233.1 | U2.22 65.19,33.55 C235.1 | U2.56 50.3,35.05 C237.1 51.93,35.67 52.2,35.94 v52.58,35.94 | U2.59 49.25,33.55 49.51,33.29 49.51,33.28 C239.1 51.29,31.5 v51.82,31.5 51.85,31.46 U2.4 | C28.1 90.55,31.09 89.59,32.05 U1.19 | U1.21 91.52,33.05 93.09,31.48 C209.1 | U1.22 92.49,33.55 C211.1 | C133.1 72.59,39.49 76.04,36.05 U1.54 | U1.56 78.24,35.05 C213.1 81.01,35.67 v81.03,35.69 | U5.21 106.02,62.2 107.82,64.01 107.82,64.38 108.85,65.41 C225.1 | U5.22 105.52,66.07 C227.1 | U5.56 104.02,50.68 C229.1 103.39,52.72 v103.89,53.21 | U3.21 105.76,91.79 108.2,94.23 C218.1 | U3.22 105.26,93.85 C219.1 | U3.56 103.76,80.53 C221.1 103.14,81.93 v104.52,83.31 | C244.1 35.07,73.29 35.84,72.52 v36.45,72.52 | C244.1 34.91,73.95 C12.1 36.11,76.16 37.38,77.42 U7.19 | U7.56 40.38,87.32 v40.7,87 40.7,86.49 40,86.49 v39.37,85.85 | v44.96,89.66 45.34,89.66 v45.85,89.15 | C1.1 C120.1 C159.1 | v37.46,61.72 38.1,61.09 v38.1,60.96 | v66.04,27.56 66.06,27.58 66.06,29.56 C233.1 | v48.26,39.37 49.28,40.39 v49.28,40.51 | C27.1 C209.1 | v94.11,31.75 93.09,30.73 C209.1 | v80.14,31.62 79.61,31.62 C215.1 78.49,32.75 78.49,33.05 77.99,33.55 U1.59 | v75.06,40.77 74.68,41.15 v74.04,41.15